# Altium PCB 400797.PcbDoc (part 1 of 8)
Units mm, origin at the board's own origin, x right, y up, seen from the top; angles counter-clockwise.
Board outline 155 x 63.5 mm, 4 copper layers (Top Layer, Mid-Layer 1, Mid-Layer 2, Bottom Layer), stack 1.514 mm thick; 333 components, 292 nets, 1555 pads, 2205 vias.
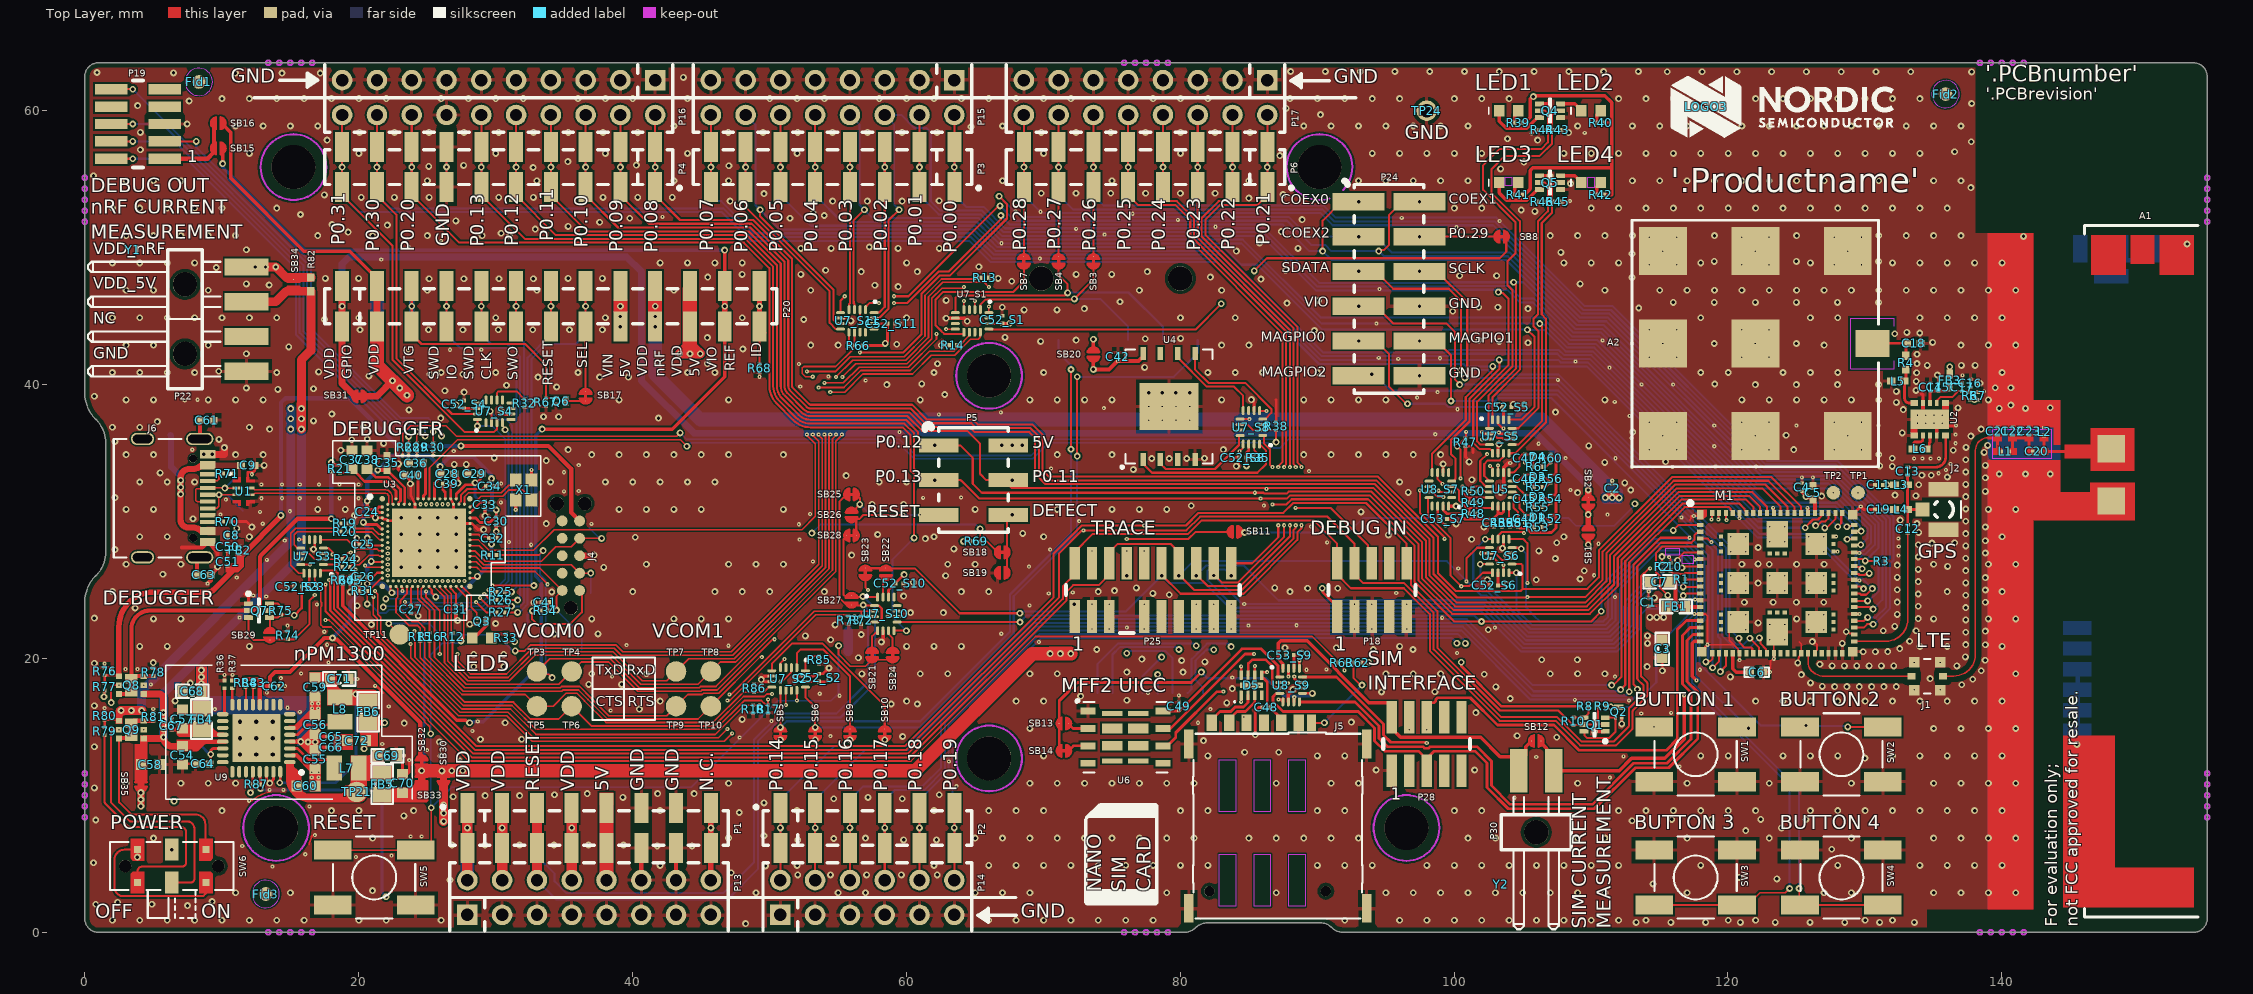
[diagram p0: Top Layer view]
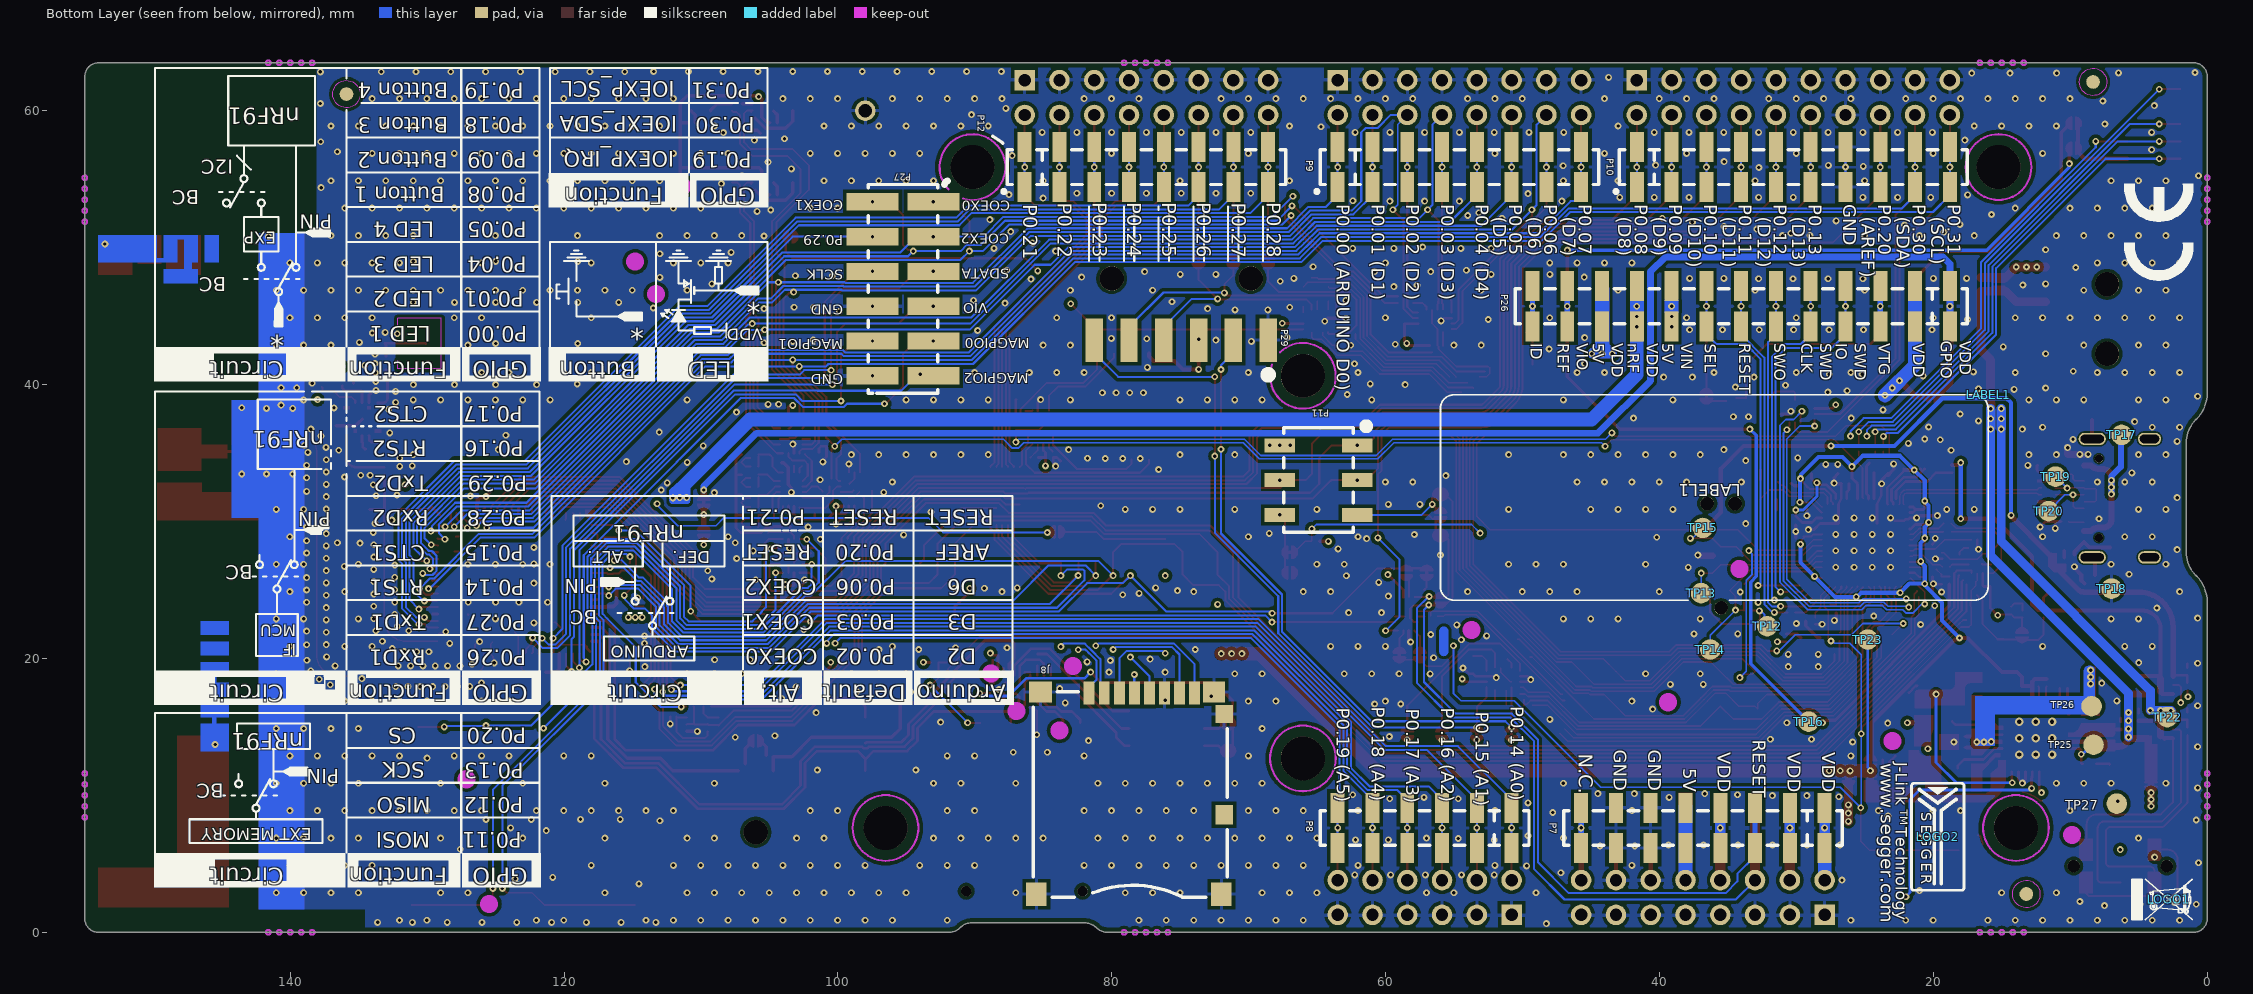
[diagram p1: Bottom Layer view, seen from below]
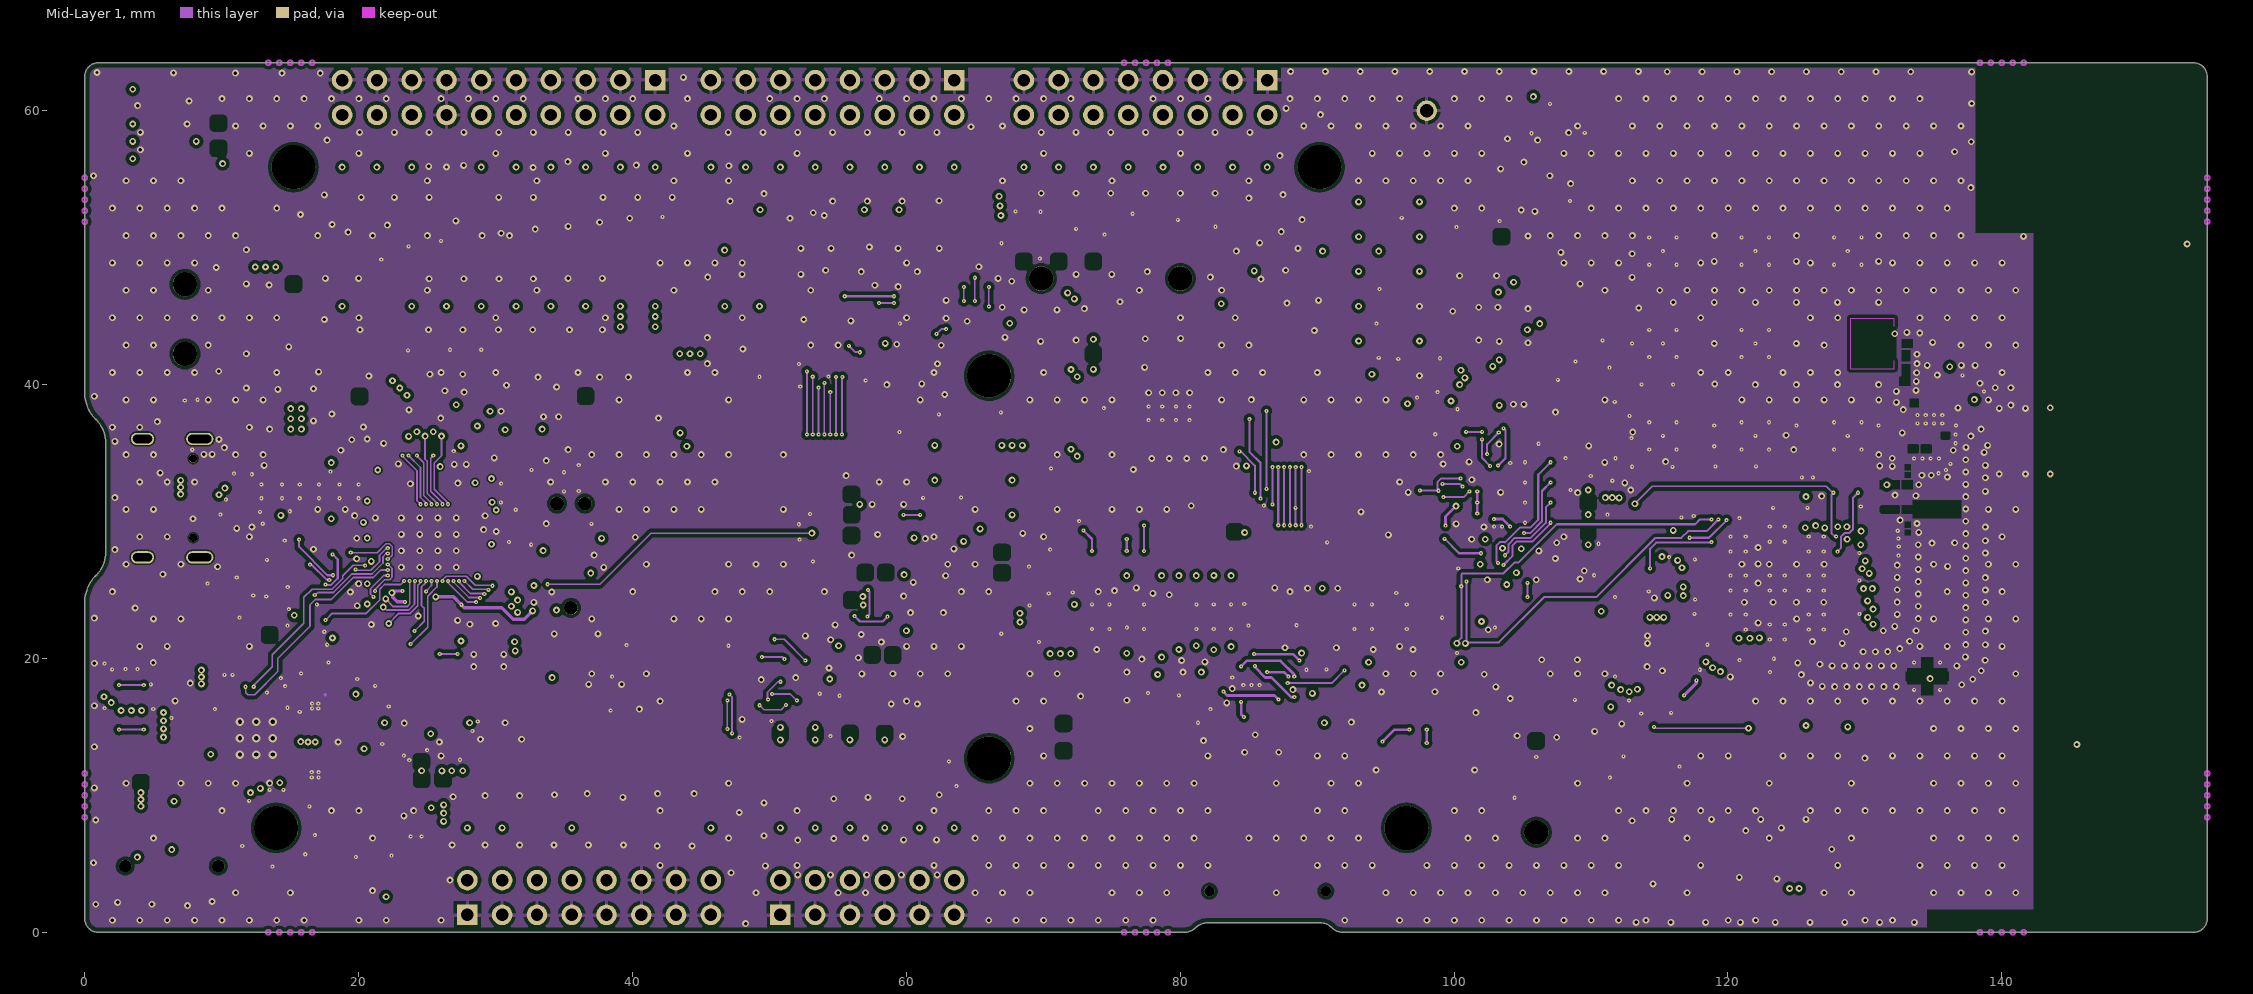
[diagram p2: Mid-Layer 1]
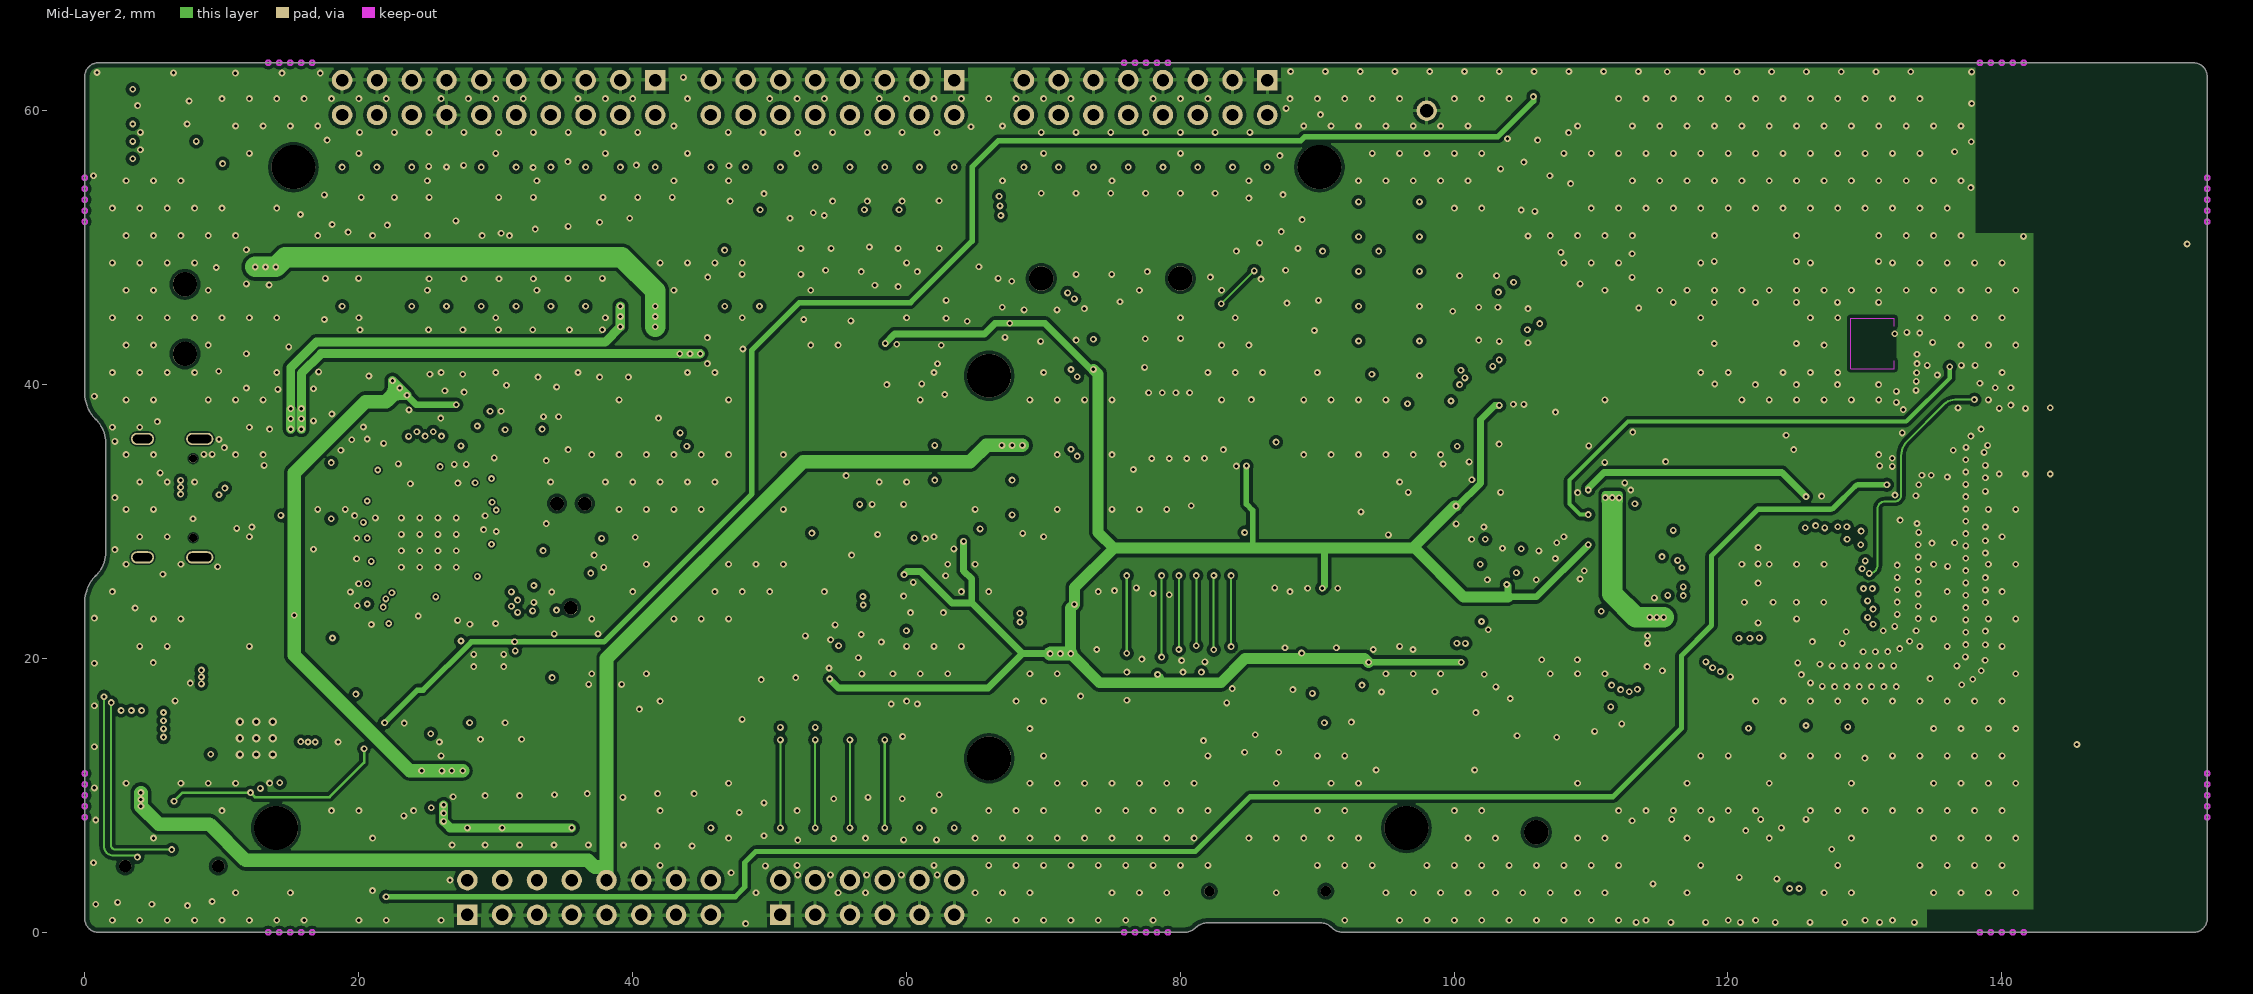
[diagram p3: Mid-Layer 2]
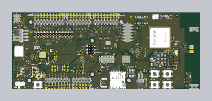
[diagram p9: 3D render of the assembled board from above, using the file's embedded part models]

## Layer stack, top to bottom
Top Solder: solder mask 0.05, Solder Resist Halogen-Free, Dk 3.5
Top Layer: signal copper 0.035
Dielectric1: prepreg 0.072, FR-4 Halogen-Free, Dk 4.18
Mid-Layer 1: signal copper 0.035
Dielectric2: core 1.23, FR-4 Halogen-Free, Dk 4.74
Mid-Layer 2: signal copper 0.035
Dielectric3: prepreg 0.072, FR-4 Halogen-Free, Dk 4.18
Bottom Layer: signal copper 0.035
Bottom Solder: solder mask 0.05, Solder Resist Halogen-Free, Dk 3.5

## Board outline
0,1 0,24.121 cw(c2.717,24.121) 0.796,26.042 0.962,26.208 ccw(c-0.876,27.751) 1.524,27.751 1.524,35.751 ccw(c-0.876,35.751) 0.962,37.294 0.796,37.46 cw(c2.717,39.381) 0,39.381 0,62.5 cw(c1,62.5) 1,63.5 154,63.5 cw(c154,62.5) 155,62.5 155,1 cw(c154,1) 154,0 91.9,0 cw(c91.9,1.18) 91.066,0.346 ccw(c90.231,-0.489) 90.231,0.691 81.969,0.691 ccw(c81.969,-0.489) 81.134,0.346 cw(c80.3,1.18) 80.3,0 1,0 cw(c1,1)

## Design rules (kind name [scope] priority, off if disabled: settings)
BoardOutlineClearance [OnLayer('Top Layer') or OnLayer('Bottom Layer') or OnLayer('Mid-Layer 1') or OnLayer('Mid-Layer 2')] p1: gap=0.35 ignorepadtopadclearanceinfootprint=FALSE
Clearance USB_C [InComponent('J6')] p1: gap=0.1 ignorepadtopadclearanceinfootprint=FALSE
Clearance IMCU_room [WithinRoom('IMCU')] p2: gap=0.1 ignorepadtopadclearanceinfootprint=FALSE
Clearance USB_Poly_Clearance [(InNamedPolygon('Top_Layer-GND')) vs (IsTrack or IsArc) and (InDifferentialPair('D') or InDifferentialPair('USB0'))] p3 off: gap=1 ignorepadtopadclearanceinfootprint=FALSE
Clearance "NPTH clearance" [Not PadIsPlated And HoleSize > 0] p4: gap=0.23 ignorepadtopadclearanceinfootprint=FALSE
Clearance SB_Clearance [HasFootprint('Solderbridge') or HasFootprint('QFN40P180X140X55-10N')] p5: gap=0.127 ignorepadtopadclearanceinfootprint=FALSE except(0: Arc-Hole Track-Hole SMDPad-Hole THPad-Hole Via-Hole Fill-Hole Poly-Hole Region-Hole Text-Hole)
Clearance CSP_Clearance [HasFootprint('BGA4C40P2X2_76X76X62')] p6: gap=0.127 ignorepadtopadclearanceinfootprint=FALSE except(0: Arc-Hole Track-Hole SMDPad-Hole THPad-Hole Via-Hole Fill-Hole Poly-Hole Region-Hole Text-Hole)
Clearance P23_Clearance [HasFootprint('FPC_05P-0.5mm-RA-SMD')] p7: gap=0.127 ignorepadtopadclearanceinfootprint=FALSE except(0: Arc-Hole Track-Hole SMDPad-Hole THPad-Hole Via-Hole Fill-Hole Poly-Hole Region-Hole Text-Hole)
Clearance PSON35P100X50-8N_Clearance [HasFootprint('PSON35P100X50-8N')] p8: gap=0.15 ignorepadtopadclearanceinfootprint=FALSE except(0: Arc-Hole Track-Hole SMDPad-Hole THPad-Hole Via-Hole Fill-Hole Poly-Hole Region-Hole Text-Hole)
Clearance "Net tie_clearance" [InComponent('NT*') vs IsPad] p9: gap=0.001 ignorepadtopadclearanceinfootprint=TRUE
Clearance Top_layer_Clearance [All vs OnLayer('Top Layer')] p10: gap=0.125 ignorepadtopadclearanceinfootprint=FALSE
Clearance Polygon_Clearance [InNamedPolygon('Top_Layer-GND') or InNamedPolygon('Bottom_Layer-GND') or InNamedPolygon('Mid_Layer_1-GND') or InNamedPolygon('Mid_Layer_2-GND')] p11: gap=0.25 ignorepadtopadclearanceinfootprint=FALSE except(0: Arc-Hole Track-Hole SMDPad-Hole THPad-Hole Via-Hole Fill-Hole Poly-Hole Region-Hole Text-Hole)
Clearance USB_Clearance [InDifferentialPairClass('All Differential Pairs')] p12: gap=0.15 ignorepadtopadclearanceinfootprint=FALSE
Clearance RF_Clerance [InNet('RF') or InNet('ANT')] p13: gap=0.203 ignorepadtopadclearanceinfootprint=FALSE except(0: Arc-Hole Track-Hole SMDPad-Hole THPad-Hole Via-Hole Fill-Hole Poly-Hole Region-Hole Text-Hole)
Clearance [All] p14: gap=0.125 ignorepadtopadclearanceinfootprint=FALSE except(0: Poly-Region Region-Region)
ComponentClearance [All] p1 off: gap=0.254 collisioncheckmode=3 verticalgap=0.254 showdistances=FALSE
DiffPairsRouting [InDifferentialPairClass('All Differential Pairs')] p1: maxlimit=0.15 minlimit=0.127 mostfreqgap=0.15 toplayer_mingap=0.15 toplayer_minwidth=0.1 toplayer_maxwidth=0.1 toplayer_prefwidth=0.1 midlayer1_maxgap=0.127 midlayer1_prefgap=0.127 midlayer1_minwidth=0.054 midlayer1_maxwidth=0.054 midlayer1_prefwidth=0.054 midlayer2_maxgap=0.127 midlayer2_prefgap=0.127 midlayer2_minwidth=0.054 midlayer2_maxwidth=0.054 midlayer2_prefwidth=0.054 bottomlayer_mingap=0.15 bottomlayer_minwidth=0.1 bottomlayer_maxwidth=0.1 bottomlayer_prefwidth=0.1 impedanceprofiledriven=TRUE impedanceprofileid={5F1D737F-A6A0-4321-8E3C-81C77A155CAF} impedanceprofilevalue=90.000000 maxuncoupledlength=12.7
FabricationTestPointUsage TestPointUsage [All] p1: valid=0 allowmultiple=FALSE
FabricationTestpoint Testpoint [All] p1: side=3 testpointundercomponent=TRUE minsize=1.016 maxsize=2.54 preferedsize=1.524 minholesize=0 maxholesize=1.016 preferedholesize=0.813 testpointgrid=0.025 allowsidetop=TRUE allowsidebottom=TRUE usegrid=TRUE gridtolerance=0
Height [All] p1 off: minheight=0 maxheight=25.4 prefheight=12.7
HoleSize [All] p1: absolutevalues=TRUE maxlimit=5 minlimit=0.1 maxpercent=80.000 minpercent=20.000
HoleToHoleClearance [All] p1: gap=0.25 allowstackedmicrovias=FALSE
MaxMinImpedance [InNetClass('USB')] p1: minimum=81.00 maximum=99.00
MinimumAnnularRing [All] p1 off: minimumring=0.152
MinimumSolderMaskSliver USB-C [HasFootprint('SD-80259-001')] p1: minsoldermaskwidth=0
MinimumSolderMaskSliver PMIC [WithinRoom('nPM1300')] p2: minsoldermaskwidth=0
MinimumSolderMaskSliver [All] p3: minsoldermaskwidth=0.05
NetAntennae NetAntennae_ANT [InNet('ANT')] p1: netantennaetolerance=40
NetAntennae [All] p2: netantennaetolerance=0
PlaneClearance [All] p1: clearance=0.25
PlaneConnect [All] p1: planeconnectstyle=Direct reliefexpansion=0.508 reliefentries=4 reliefconductorwidth=0.254 reliefairgap=0.254
PolygonConnect VDD_nRF [InNet('VDD_nRF')] p1: connectstyle=Direct reliefconductorwidth=0.254 reliefentries=4 polygonreliefangle="90 Angle" airgapwidth=0.254
PolygonConnect VCC_and_VDD [InNet('NetC50_2') or InNet('NetC8_2') or InNet('NetC70_2') or InNet('VDD')] p2: connectstyle=Direct reliefconductorwidth=0.254 reliefentries=4 polygonreliefangle="90 Angle" airgapwidth=0.254
PolygonConnect GND_Poly [isVia and innet(gnd) or isVia and innet('VDD') or HasFootprint('COAXIAL-SWF') or isVia and innet('VDD_SAM') or InComponent('R80') or HasFootprint('COAXIAL RF U.FL-R-SMT-1') or HasFootprint('DSGP.1575.18') or HasFootprint('DX07S016JA1R1500') or InComponent('C65')or InComponent('C66')or InComponent('C72')] p3: connectstyle=Direct reliefconductorwidth=0.254 reliefentries=4 polygonreliefangle="90 Angle" airgapwidth=0.254
PolygonConnect General [All] p4: connectstyle=Relief reliefconductorwidth=0.254 reliefentries=4 polygonreliefangle="90 Angle" airgapwidth=0.254
RoomDefinition IMCU [InComponentClass('IMCU') vs False] p1: confinementstyle=ConfineIn formatcopy=TRUE lockcomponents=FALSE outline 18.089,33.044 18.089,34.657 18.67,34.657 18.67,36.019 21.455,36.019 21.455,35.514 22.755,35.514 22.755,34.944 25.405,34.944 25.405,34.164 27.705,34.164 29.68,34.164 29.68,33.844 33.38,33.844 33.38,30.783 30.586,30.783 30.586,29.228 30.582,29.228 30.582,28.248 28.954,28.248 28.954,24.43 27.636,24.43 27.636,22.778 24.279,22.778 24.279,20.471 21.721,20.471 21.721,24.43 20.321,24.43 20.321,25.423 19.543,25.423 19.543,27.798 19.543,33.009 18.67,33.009 18.67,33.044
RoomDefinition nPM1300 [InComponentClass('nPM1300') vs False] p2: confinementstyle=ConfineIn formatcopy=TRUE lockcomponents=FALSE outline 5.35,8.145 5.35,10.653 5.818,10.653 5.818,15.861 6.348,15.861 6.348,17.026 6.398,17.026 6.398,18.376 9.691,18.376 9.691,18.879 10.26,18.879 10.26,18.886 16.048,18.886 16.048,19.363 17.248,19.363 17.248,19.376 19.114,19.376 19.114,39.997 21.021,39.997 21.021,22.634 26.049,22.634 26.049,12.152 27.049,12.152 27.049,10.245 23.973,10.245 23.973,9.42 22.781,9.42 22.781,9.118 20.381,9.118 20.381,8.543 7.858,8.543 7.858,8.145
RoutingLayers RoutingLayers_1 [IsMicroVia] p1: top layer_v5=TRUE mid layer 1_v5=TRUE mid layer 2_v5=FALSE bottom layer_v5=FALSE
RoutingLayers [All] p2: top layer_v5=TRUE mid layer 1_v5=TRUE mid layer 2_v5=TRUE bottom layer_v5=TRUE
RoutingVias [All] p1: holewidth=0.25 width=0.5 viastyle="Through Hole" minholewidth=0.1 minwidth=0.3 maxholewidth=0.305 maxwidth=0.61
ShortCircuit "PVSS and GND" [InNet('PVSS1') or InNet('PVSS2') vs InNet('GND')] p1: allowed=TRUE
ShortCircuit ShortCircuit_1 [HasFootprint('P822601')] p2: allowed=TRUE
ShortCircuit [All] p3: allowed=FALSE
SilkToSilkClearance [All] p1: silktosilkclearance=0.15
SilkToSolderMaskClearance SilkscreenOverComponentPads [IsPad] p1: minsilkscreentomaskgap=0.254 clearancetoexposedcopper=TRUE
SolderMaskExpansion SolderMaskExpansion_Via [IsVia] p1: expansion=0.102 istentingtop=TRUE
SolderMaskExpansion SolderMaskExpansion_USB [HasFootprint('L-KLS1-5473')] p2: expansion=0.06 istentingtop=FALSE
SolderMaskExpansion [All] p3: expansion=0.076 istentingtop=FALSE
UnpouredPolygon [All] p1 off:
Width Width_RF [InNet('ANT') or InNet('LTE_RF1') or InNet('GPS_RF1')] p1: maxlimit=0.254 minlimit=0.1 preferedwidth=0.254 toplayer_maxwidth=0.1 toplayer_prefwidth=0.1 bottomlayer_maxwidth=0.1 bottomlayer_prefwidth=0.1 impedanceprofiledriven=TRUE impedanceprofileid={28F3A609-7DB3-45B1-BB45-39A827C1017D} impedanceprofilevalue=50.000000 minimp=50.000000 maximp=50.000000 favimp=50.000000
Width Width_Diff [(InDifferentialPairClass('All Differential Pairs'))] p2: maxlimit=0.165 minlimit=0.1 preferedwidth=0.165 toplayer_maxwidth=0.1 toplayer_prefwidth=0.1 bottomlayer_maxwidth=0.1 bottomlayer_prefwidth=0.1 minimp=50.000000 maximp=50.000000 favimp=50.000000
Width Width_GPIO [InNetClass('GPIO')] p3: maxlimit=0.152 minlimit=0.125 preferedwidth=0.15 minimp=50.000000 maximp=50.000000 favimp=50.000000
Width Width_GPIO_1 [InNetClass('COEX')] p4: maxlimit=0.152 minlimit=0.125 preferedwidth=0.15 minimp=50.000000 maximp=50.000000 favimp=50.000000
Width Width_GPIO_2 [InNetClass('SWD')] p5: maxlimit=0.152 minlimit=0.125 preferedwidth=0.15 minimp=50.000000 maximp=50.000000 favimp=50.000000
Width Width_GPIO_3 [InNetClass('UART')] p6: maxlimit=0.152 minlimit=0.125 preferedwidth=0.15 minimp=50.000000 maximp=50.000000 favimp=50.000000
Width [All] p7: maxlimit=2.54 minlimit=0.125 preferedwidth=0.15
14 further rules are at their usual default settings.

## Classes and differential pairs
differential pair class IMCU: D
differential pair class D:J6: D:J6
net class USB: D:J6_N D:J6_P D_N D_P
net class VCOM: VCOM0_CTRL VCOM0_CTS VCOM0_HWFC VCOM0_RTS VCOM0_RXD VCOM0_TXD VCOM1_CTRL VCOM1_CTS VCOM1_HWFC VCOM1_RTS VCOM1_RXD VCOM1_TXD
net class nRF9151_UART: P0.14/AIN1 P0.15/AIN2 P0.16/AIN3 P0.17/AIN4 P0.26 P0.27 P0.28 P0.29
net class EXT_MEM: P0.11 P0.12 P0.13/AIN0 P0.20/AIN7
component class IMCU: C24 C25 C26 C27 C28 C29 C30 C31 C32 C33 C34 C35 C36 C37 C38 C39 C40 R21 TP11 U3 X1
component class nPM1300: C54 C55 C56 C57 C59 C60 C62 C64 C65 C66 C67 C68 C69 C70 C71 C72 FB4 FB5 FB6 L7 L8 R36 R37 R87 SB30 SB31 SB32 SB33 TP21 TP23 TP25 TP26 TP27 U9
net class RF: ANT GPS_RF1 GPS_RF2 GPS_RF3 GPS_RF4 GPS_RF5 LTE_RF1 NetA1_1 NetC20_1
channel class pca10171_switch_nx: S7 S9
channel class pca10171_switch_fsa: S1 S2 S3 S4 S5 S6 S8 S10 S11
net class SWD: P0.22 RESET SWD0_CLK SWD0_IO SWD0_RESET SWD0_SEL SWD0_SWO SWD1_CLK SWD1_IO SWD1_RESET SWD1_SEL SWD1_SWO SWD3_CLK SWD3_IO SWD3_RESET SWD3_SWO SWD_CTRL SWDCLK SWDIO
net class COEX: COEX0 COEX1 COEX2 MAGPIO0 MAGPIO1 MAGPIO2 MIPI_SCLK MIPI_SDATA MIPI_VIO
net class GPIO: AREF BTN1_EXT BTN2_EXT BTN3_EXT BTN4_EXT BUTTON1 BUTTON2 BUTTON3 BUTTON4 COEX0 COEX1 COEX2 COEX_SELECT COM.CH1_S1 COM.CH2_S2 COM.CH3_S1 COM.CH4_S2 EXT_MEM_C\S\ EXT_MEM_CTRL EXT_MEM_MISO EXT_MEM_MOSI EXT_MEM_SCK IMCU_LED IMCU_SCL IMCU_SDA INT_EXT IOEXP_CTRL LED1 LED1_EXT LED2 LED2_EXT LED3 LED3_EXT LED4 LED4_EXT MAGPIO0 MAGPIO1 MAGPIO2 MIPI_SCLK MIPI_SDATA MIPI_VIO NC.CH1_S3 NC.CH3_S3 NC.CH4_S3 NetC44_1 NetC45_2 NetC46_2 NetC47_2 NetR51_1 NetR58_1 NO.CH1_S8 P0.00 P0.01 P0.02 P0.03 P0.04 P0.05 P0.06 P0.07 P0.08 P0.09 P0.10 P0.11 P0.12 P0.13/AIN0 P0.14/AIN1 P0.15/AIN2 P0.16/AIN3 P0.17/AIN4 P0.18/AIN5 P0.19/AIN6 P0.20/AIN7 P0.21 P0.22 P0.23 P0.24 P0.25 P0.26 P0.27 P0.28 P0.29 P0.30 P0.31 RESET RESET_BUTTON RESET_IN_CTRL RESET_OUT_CTRL SCL_EXT SDA_EXT SHIELD_DETECT SIM_SELECT SWD0_CLK SWD0_IO SWD0_RESET SWD0_SEL SWD0_SWO SWD1_CLK SWD1_IO SWD1_RESET SWD1_SEL SWD1_SWO SWD3_CLK SWD3_IO SWD3_RESET SWD3_SWO SWD_CTRL SWDCLK SWDIO TGT_SCL TGT_SDA TGT_TWI_CTRL UART1.CTS UART1.RTS UART1.RXD UART1.TXD UART2.CTS UART2.RTS UART2.RXD UART2.TXD USB_DETECT VCOM0_CTRL VCOM0_CTS VCOM0_HWFC VCOM0_RTS VCOM0_RXD VCOM0_TXD VCOM1_CTRL VCOM1_CTS VCOM1_HWFC VCOM1_RTS VCOM1_RXD VCOM1_TXD VIO_REF_SENSE
differential pair D: +D_P -D_N
differential pair D:J6: +D:J6_P -D:J6_N

## Components (designator, comment, footprint, x,y, rotation, side; value= is the part's Value field where it differs from the comment)
A1 "P822601" P822601 150.28,26.417 r270 top
A2 "DSGP.1575.18" DSGP.1575.18.4.C.02 122,43 r90 top
C1 "1.0µF" CAPC0603X03L_C 114.19,24.1 r90 top
C2 "1.0µF" CAPC0603X03L_C 111.55,32.425 r90 top
C3 "10µF" CAPC1608X06L 115.2,20.7 r270 top
C4 "100nF" CAPC0603X03L_C 125.4,32.5 r90 top
C5 "4.7µF" CAPC1005X04L 126.2,32.1 r90 top
C6 "4.7µF" CAPC1005X04L 122.1,19 r0 top
C7 "10µF" CAPC1608X06L 115,25.6 r180 top
C8 "100nF" CAPC0603X03L_C 10.7,29 r180 top
C9 "1.0µF" CAPC1005X04L 11.9,34.1 r180 top
C10 "100nF" CAPC0603X03L_C 115.8,26.7 r90 top
C11 "39pF" CAPC0603X03L_C 131.03,32.68 r0 top
C12 "39pF" CAPC0603X03L_C 133.13,29.48 r270 top
C13 "39pF" CAPC0603X03L_C 133.13,33.682 r270 top
C14 "100pF" CAPC0603X03L_C 134.8,39.822 r270 top
C15 "100nF" CAPC0603X03L_C 135.375,39.822 r270 top
C16 "100nF" CAPC0603X03L_C 137.7,40.1 r270 top
C17 "100pF" CAPC0603X03L_C 137.1,39.8 r270 top
C18 "N.C." CAPC1005X04L_NC 133.575,43 r0 top
C19 "N.C." CAPC0603X03L_C_NC 131.03,30.88 r0 top
C20 "3.5pF" CAPC0603X03L_C 142.545,35.117 r0 top
C21 "N.C." CAPC0603X03L_C_NC 139.7,36.577 r270 top
C22 "N.C." CAPC0603X03L_C_NC 140.784,36.577 r270 top
C23 "N.C." CAPC0603X03L_C_NC 141.986,36.577 r270 top
C24 "100nF" CAPC0603X03L_C 20.625,30.709 r90 top
C25 "100nF" CAPC0603X03L_C 20.35,28.334 r0 top
C26 "100nF" CAPC0603X03L_C 20.35,25.959 r180 top
C27 "100nF" CAPC0603X03L_C 23.827,23.584 r90 top
C28 "1.0µF" CAPC1005X04L 26.475,33.484 r0 top
C29 "1.0µF" CAPC1005X04L 28.45,33.484 r0 top
C30 "2.2nF" CAPC0603X03L_C 30.05,30.034 r270 top
C31 "100nF" CAPC0603X03L_C 27.1,23.584 r90 top
C32 "100nF" CAPC0603X03L_C 29.775,28.784 r180 top
C33 "100nF" CAPC0603X03L_C 29.225,31.234 r90 top
C34 "100nF" CAPC0603X03L_C 29.575,32.575 r0 top
C35 "1.0µF" CAPC1005X04L 22.075,34.284 r270 top
C36 "1.0µF" CAPC1005X04L 24.175,34.264 r0 top
C37 "4.7µF" CAPC1608X06L 19.5,34.514 r90 top
C38 "4.7µF" CAPC1608X06L 20.625,34.514 r90 top
C39 "100nF" CAPC0603X03L_C 26.444,32.759 r0 top
C40 "1.0µF" CAPC1005X04L 23.825,33.389 r0 top
C41 "10nF" CAPC0603X03L_C 33.625,24.1 r0 top
C42 "100nF" CAPC0603X03L_C 75.45,42.05 r270 top
C43 "100nF" CAPC0603X03L_C 102.927,29.912 r90 top
C44 "1.0µF" CAPC0603X03L_C 105.174,30.191 r270 top
C45 "1.0µF" CAPC0603X03L_C 105.174,31.664 r90 top
C46 "1.0µF" CAPC0603X03L_C 105.174,33.137 r90 top
C47 "1.0µF" CAPC0603X03L_C 105.174,34.611 r90 top
C48 "10nF" CAPC0603X03L_C 86.275,16.425 r180 top
C49 "N.C." CAPC0603X03L_C_NC 79.9,16.5 r270 top
C50 "10nF" CAPC0603X03L_C 10.425,28.15 r90 top
C51 "100nF" CAPC0603X03L_C 10.425,27.05 r270 top
C52_S1 "100nF" CAPC0603X03L_C 67,44.75 r90 top (schematic designator C52)
C52_S2 "100nF" CAPC0603X03L_C 53.625,18.6 r90 top (schematic designator C52)
C52_S3 "100nF" CAPC0603X03L_C 15.55,25.25 r180 top (schematic designator C52)
C52_S4 "100nF" CAPC0603X03L_C 27.7,38.55 r90 top (schematic designator C52)
C52_S5 "100nF" CAPC0603X03L_C 103.898,38.359 r0 top (schematic designator C52)
C52_S6 "100nF" CAPC0603X03L_C 102.923,25.334 r180 top (schematic designator C52)
C52_S8 "100nF" CAPC0603X03L_C 84.553,34.671 r180 top (schematic designator C52)
C52_S10 "100nF" CAPC0603X03L_C 59.5,25.475 r0 top (schematic designator C52)
C52_S11 "100nF" CAPC0603X03L_C 58.9,44.45 r0 top (schematic designator C52)
C53_S7 "100nF" CAPC0603X03L_C 99.197,30.192 r0 top (schematic designator C53)
C53_S9 "100nF" CAPC0603X03L_C 88,20.25 r180 top (schematic designator C53)
C54 "1.0µF" CAPC1608X06L 7.127,12.922 r90 top
C55 "10µF" CAPC1608X06L 16.827,12.622 r90 top
C56 "10µF" CAPC1608X06L 16.827,15.172 r270 top
C57 "10µF" CAPC1608X06L 7.127,15.572 r270 top
C58 "4.7µF" CAPC1608X06L 4.795,12.243 r180 top
C59 "10µF" CAPC1608X06L 16.827,17.909 r90 top
C60 "10µF" CAPC1608X06L 16.15,10.7 r180 top
C61 "10nF" CAPC1005X04L 8.9,37.4 r0 top
C62 "100nF" CAPC0603X03L_C 13.825,17.975 r0 top
C63 "10nF" CAPC1005X04L 8.7,26.1 r0 top
C64 "1.0µF" CAPC1005X04L 8.6,12.3 r0 top
C65 "1.0nF" CAPC0603X03L_C 18.012,14.297 r180 top
C66 "1.0nF" CAPC0603X03L_C 18.012,13.497 r180 top
C67 "1.0nF" CAPC0603X03L_C 6.327,15.082 r270 top
C68 "N.C." CAPC1608X06L_NC 7.852,17.597 r0 top
C69 "N.C." CAPC1608X06L_NC 22.102,12.897 r180 top
C70 "100nF" CAPC1608X06L 23.194,10.874 r270 top
C71 "N.C." CAPC1608X06L_NC 18.581,18.505 r180 top
C72 "100nF" CAPC1608X06L 19.852,13.997 r0 top
D1 "CFSH05-20L" SODFL35X40-2N 106.114,30.318 r180 top
D2 "CFSH05-20L" SODFL35X40-2N 106.114,31.791 r180 top
D3 "CFSH05-20L" SODFL35X40-2N 106.114,33.264 r180 top
D4 "CFSH05-20L" SODFL35X40-2N 106.114,34.738 r180 top
D5 "TPD3F303DPVR" SON50P210X160X65_HS-9N 85.2,18.05 r90 top
FB1 "22R@100M/6A" INDC1608X06L 116.2,23.8 r0 top
FB2 "120R/0.9A" INDC0603X03L_C 11.3,27.9 r270 top
FB3 "120R/1.2A" INDC1005X04L 136.2,40.3 r90 top
FB4 "0R" RESC2012X11L 8.527,15.572 r90 top
FB5 "0R" RESC2012X11L 21.727,10.822 r270 top
FB6 "0R" RESC2012X11L 20.7,16.1 r270 top
Fid1 "Fiducial mark" Fiducial 8.335,62.104 r0 top value=N.A.
Fid2 "Fiducial mark" Fiducial 135.89,61.214 r0 top value=N.A.
Fid3 "Fiducial mark" Fiducial 13.208,2.795 r0 top value=N.A.
J1 "MM8130-2600" COAXIAL-SWF 134.554,18.7 r90 top
J2 "MHF I Receptacle" "COAXIAL RF U.FL-R-SMT-1" 135.73,30.88 r270 top
J4 "TC2050-IDC" TC2050-IDC-NLFP 35.5,27.5 r90 top
J5 "KLS1-SIM-066" KLS1-SIM-066 82.3,15.3 r0 top
J6 "USB-C 2.0" SD-80259-001 6.6,31.705 r270 top
J8 "microSD Card Connector" Molex_502774-0891 72.75,17.55 r0 bottom
L1 "1.5nH" INDC0603X03L_C 140.233,35.117 r0 top
L2 "22nH" INDC0603X03L_C 143.084,36.573 r270 top
L3 "68nH" INDC1005X04L_WW 132.63,32.68 r0 top
L4 "N.C." INDC1005X04L_NC 132.63,30.88 r180 top
L5 "N.C." INDC1005X04L_NC 132.4,40.25 r180 top
L6 "9.1nH" INDC1005X04L_WW 134,35.3 r180 top
L7 "2.2µH" INDC2016X10N 19.112,11.997 r180 top
L8 "2.2µH" INDC2016X10N 18.625,16.275 r270 top
LABEL1 "15x40mm" LabelSilk_15x40 16,39.251 r0 bottom
LED1 "L0603G" LED_0603_G 104,60 r0 top
LED2 "L0603G" LED_0603_G 110,60 r0 top
LED3 "L0603G" LED_0603_G 104,54.75 r0 top
LED4 "L0603G" LED_0603_G 110,54.75 r0 top
LED5 "L0603G" LED_0603_G 29,21.5 r0 top
LOGO1 "WEE Symbol" WEE_3x4.5mm 2.8,2.4 r270 bottom
LOGO2 "Segger Logo S" SEGGER_LOGO_S 19.675,6.975 r270 bottom
LOGO3 "Nordic Logo" NORDIC_LOGO_LYING 118.4,60.275 r0 top
M1 "nRF9151-LACAA0A" LGA50P1210X1110X130-113N 123.6,25.5 r270 top
P1 "Socket 1x8" SOCKET_1x8_SMD 27.94,7.621 r0 top
P2 "Socket 1x6" SOCKET_1x6_SMD 50.8,7.621 r0 top
P3 "Socket 1x8" SOCKET_1x8_SMD 63.5,55.881 r180 top
P4 "Socket 1x10" SOCKET_1x10_SMD 41.656,55.881 r180 top
P5 "Pin Hdr 2x3" HDR_2x3-SMD 64.897,33.021 r270 top
P6 "Socket 1x8" SOCKET_1x8_SMD 86.36,55.881 r180 top
P7 "Pin List 1x8" LIST_1x8_SMD-NC 27.94,7.621 r0 bottom
P8 "Pin List 1x6" LIST_1x6_SMD-NC 50.8,7.621 r0 bottom
P9 "Pin List 1x8" LIST_1x8_SMD-NC 63.5,55.881 r180 bottom
P10 "Pin List 1x10" LIST_1x10_SMD-NC 41.656,55.881 r180 bottom
P11 "Socket 2x3" SOCKET_2x3_SMD-2.54mm-bottom-NC 64.897,33.021 r270 top
P12 "Pin List 1x8" LIST_1x8_SMD-NC 86.36,55.881 r180 bottom
P13 "Pin Header 2x8" HDR_2x8-NC 36.83,2.541 r0 top
P14 "Pin Header 2x6" HDR_2x6-NC 57.15,2.541 r0 top
P15 "Pin Header 2x8" HDR_2x8-NC 54.61,60.961 r180 top
P16 "Pin Header 2x10" HDR_2x10-NC 30.226,60.961 r180 top
P17 "Pin Header 2x8" HDR_2x8-NC 77.47,60.961 r180 top
P18 "Pin Header 2x5, 1.27mm" HDR_2x5-SMD-1.27mm-K 94,25 r0 top
P19 "Pin Header 2x5, 1.27mm" HDR_2x5-SMD-1.27mm-K 3.886,59.031 r90 top
P20 "Pin List 1x13" LIST_1x13_SMD 18.796,45.721 r0 top
P22 "Pin List 1x4, Angled" LIST_ANG_1x4-SMD-2.54MM 11.811,44.779 r270 top
P24 "Socket 2x6" SOCKET_2x6_SMD-2.54mm#1 95.25,46.991 r270 top
P25 "Pin Header 2x10, 1.27mm, SWD" HDR_2x10-SMD-1.27mm-K-SWD 78,25 r0 top
P26 "Socket 1x13" LIST_1x13_SMD-NC 18.796,45.721 r0 bottom
P27 "Socket 2x6" SOCKET_2x6_SMD-2.54mm#2 95.25,46.991 r270 bottom
P28 "Pin Header 2x5, 1.27mm" HDR_2x5-SMD-1.27mm 98,13.75 r0 top
P29 "Pin List 1x6, Angled" LIST_ANG_1x6-SMD-2.54MM 74.93,43.25 r0 bottom
P30 "Pin List 1x2, Angled" LIST_ANG_1x2-SMD-2.54MM 106,11.8 r0 top
Q1 "DMC2400UV" SOTFL50P162X60-6N 110.265,15.175 r180 top
Q2 "RV2C010UNT2L" DFN65P100X40-3L 112.015,16.1 r90 top
Q3 "RV2C010UNT2L" DFN65P100X40-3L 28.975,22.725 r0 top
Q4 "UM6X1NA" SOTFL50P162X60-6N 107,60 r180 top
Q5 "UM6X1NA" SOTFL50P162X60-6N 107,54.75 r180 top
Q6 "RV2C010UNT2L" DFN65P100X40-3L 34.775,38.8 r0 top
Q7 "DMC2400UV" SOTFL50P162X60-6N 12.725,23.5 r0 top
Q8 "MCM2301" DFN65P200X200X80_HS-6N 3.4,18.05 r0 top
Q9 "MCM2301" DFN65P200X200X80_HS-6N 3.4,14.8 r0 top
R1 "10k" RESC0603X03L_C 116.6,25.8 r0 top
R2 "1k" RESC0603X03L_C 115.2,26.7 r270 top
R3 "1M0" RESC0603X03L_C 131.2,27.1 r180 top
R4 "0R" RESC1005X04L 133,41.6 r90 top
R6 "1k" RESC0603X03L_C 137.675,39.172 r90 top
R7 "1M0" RESC0603X03L_C 138.25,39.172 r270 top
R8 "10k" RESC0603X03L_C 109.54,16.5 r0 top
R9 "N.C." RESC0603X03L_C_NC 110.815,16.5 r0 top
R10 "100k" RESC0603X03L_C 108.715,15.4 r90 top
R11 "150R" RESC0603X03L_C 29.775,27.55 r0 top
R12 "150R" RESC0603X03L_C 26.85,21.584 r270 top
R13 "1M0" RESC0603X03L_C 65.725,47.8 r0 top
R14 "1M0" RESC0603X03L_C 63.4,42.875 r0 top
R15 "150R" RESC0603X03L_C 24.5,21.584 r270 top
R16 "150R" RESC0603X03L_C 25.175,21.584 r270 top
R17 "1M0" RESC0603X03L_C 49.9,16.3 r270 top
R18 "1M0" RESC0603X03L_C 48.8,16.3 r90 top
R19 "150R" RESC0603X03L_C 18.975,29.859 r180 top
R20 "150R" RESC0603X03L_C 18.975,29.259 r180 top
R21 "2R2" RESC0603X03L_C 18.625,33.85 r270 top
R22 "150R" RESC0603X03L_C 19.075,26.684 r180 top
R23 "N.C." RESC0603X03L_C_NC 16.675,25.25 r180 top
R24 "1M0" RESC0603X03L_C 19.075,27.275 r180 top
R25 "150R" RESC0603X03L_C 30.375,24.859 r0 top
R26 "150R" RESC0603X03L_C 30.375,24.259 r0 top
R27 "150R" RESC0603X03L_C 30.375,23.359 r0 top
R28 "150R" RESC0603X03L_C 23.65,35.409 r90 top
R29 "150R" RESC0603X03L_C 24.25,35.409 r90 top
R30 "150R" RESC0603X03L_C 25.45,35.409 r90 top
R31 "1M0" RESC0603X03L_C 20.35,24.925 r180 top
R32 "1M0" RESC0603X03L_C 32.1,38.65 r90 top
R33 "120R" RESC0603X03L_C 30.75,21.5 r270 top
R34 "100k" RESC0603X03L_C 33.625,23.5 r180 top
R35 "100k" RESC0603X03L_C 85.653,34.671 r180 top
R36 "47k" RESC0603X03L_C 10.2,18.1 r90 top
R37 "150k" RESC0603X03L_C 10.769,18.107 r90 top
R38 "1M0" RESC0603X03L_C 87.003,36.946 r270 top
R39 "120R" RESC0603X03L_C 104.699,59.118 r0 top
R40 "120R" RESC0603X03L_C 110.699,59.118 r0 top
R41 "120R" RESC0603X03L_C 104.699,53.868 r0 top
R42 "120R" RESC0603X03L_C 110.699,53.868 r0 top
R43 "1M0" RESC0603X03L_C 107.574,58.6 r180 top
R44 "1M0" RESC0603X03L_C 106.456,58.6 r0 top
R45 "1M0" RESC0603X03L_C 107.563,53.35 r180 top
R46 "1M0" RESC0603X03L_C 106.445,53.35 r0 top
R47 "1M0" RESC0603X03L_C 100.825,35.775 r90 top
R48 "4k7" RESC0603X03L_C 101.403,30.572 r0 top
R49 "4k7" RESC0603X03L_C 101.403,31.385 r0 top
R50 "12k" RESC0603X03L_C 101.403,32.198 r0 top
R51 "12k" RESC0603X03L_C 104.68,29.912 r270 top
R52 "100k" RESC0603X03L_C 107.048,30.191 r90 top
R53 "18k" RESC0603X03L_C 106.114,29.581 r0 top
R54 "100k" RESC0603X03L_C 107.048,31.664 r90 top
R55 "18k" RESC0603X03L_C 106.114,31.055 r0 top
R56 "100k" RESC0603X03L_C 107.048,33.137 r90 top
R57 "18k" RESC0603X03L_C 106.114,32.528 r0 top
R58 "0R" RESC0603X03L_C 104.095,29.912 r270 top
R59 "N.C." RESC0603X03L_C_NC 103.511,29.912 r90 top
R60 "100k" RESC0603X03L_C 107.048,34.611 r90 top
R61 "18k" RESC0603X03L_C 106.114,34.001 r0 top
R62 "1M0" RESC0603X03L_C 92.95,19.7 r180 top
R63 "100k" RESC0603X03L_C 91.8,19.7 r0 top
R64 "100k" RESC0603X03L_C 18.825,25.7 r90 top
R65 "100k" RESC0603X03L_C 19.4,25.7 r90 top
R66 "1M0" RESC0603X03L_C 56.5,42.85 r180 top
R67 "1M0" RESC0603X03L_C 33.675,38.7 r270 top
R68 "1k87" RESC0603X03L_C 49.276,41.175 r90 top
R69 "1M0" RESC0603X03L_C 65.1,28.55 r180 top
R70 "5k1" RESC0603X03L_C 10.4,30 r180 top
R71 "5k1" RESC0603X03L_C 10.4,33.5 r180 top
R72 "1M0" RESC0603X03L_C 56.7,22.8 r270 top
R73 "1M0" RESC0603X03L_C 55.775,22.8 r90 top
R74 "47k" RESC0603X03L_C 14.825,21.7 r270 top
R75 "1M0" RESC0603X03L_C 14.325,23.5 r90 top
R76 "100k" RESC0603X03L_C 1.45,19.05 r90 top
R77 "10k" RESC0603X03L_C 1.45,17.95 r270 top
R78 "150k" RESC0603X03L_C 5,19 r270 top
R79 "10k" RESC0603X03L_C 1.45,14.7 r90 top
R80 "1M0" RESC0603X03L_C 1.45,15.8 r90 top
R81 "100k" RESC0603X03L_C 5,15.735 r90 top
R82 "N.C." RESC1005X04L_NC 16.51,47.319 r270 top
R83 "4k7" RESC0603X03L_C 12.337,18.217 r90 top
R84 "4k7" RESC0603X03L_C 11.737,18.217 r90 top
R85 "100k" RESC0603X03L_C 53.625,19.9 r270 top
R86 "100k" RESC0603X03L_C 48.875,17.825 r90 top
R87 "0R" RESC0603X03L_C 12.537,10.8 r0 top
SB1 "Solderbridge" Solderbridge 109.8,29.2 r90 top
SB2 "Solderbridge" Solderbridge_Shorted 109.8,31.4 r270 top net-tie
SB3 "Solderbridge" Solderbridge_Shorted 73.66,49 r270 top net-tie
SB4 "Solderbridge" Solderbridge_Shorted 71.12,49 r270 top net-tie
SB5 "Solderbridge" Solderbridge_Shorted 50.8,14.5 r90 top net-tie
SB6 "Solderbridge" Solderbridge_Shorted 53.34,14.5 r90 top net-tie
SB7 "Solderbridge" Solderbridge_Shorted 68.58,49 r270 top net-tie
SB8 "Solderbridge" Solderbridge_Shorted 103.473,50.801 r0 top net-tie
SB9 "Solderbridge" Solderbridge_Shorted 55.88,14.5 r90 top net-tie
SB10 "Solderbridge" Solderbridge_Shorted 58.42,14.5 r90 top net-tie
SB11 "Solderbridge" Solderbridge 84,29.25 r0 top
SB12 "Solderbridge" Solderbridge 106,13.975 r180 top
SB13 "Solderbridge" Solderbridge 71.5,15.25 r180 top
SB14 "Solderbridge" Solderbridge_Shorted 71.5,13.25 r180 top net-tie
SB15 "Solderbridge" Solderbridge 9.75,57.25 r0 top
SB16 "Solderbridge" Solderbridge 9.75,59.095 r0 top
SB17 "Solderbridge" Solderbridge_Shorted 36.576,39.148 r90 top net-tie
SB18 "Solderbridge" Solderbridge_Shorted 67,27.75 r180 top net-tie
SB19 "Solderbridge" Solderbridge 67,26.25 r0 top
SB20 "Solderbridge" Solderbridge 73.66,42.205 r90 top
SB21 "Solderbridge" Solderbridge_Shorted 57.5,20.25 r270 top net-tie
SB22 "Solderbridge" Solderbridge 58.5,26.25 r270 top
SB23 "Solderbridge" Solderbridge_Shorted 57,26.25 r270 top net-tie
SB24 "Solderbridge" Solderbridge_Shorted 59,20.25 r270 top net-tie
SB25 "Solderbridge" Solderbridge_Shorted 56,31.981 r0 top net-tie
SB26 "Solderbridge" Solderbridge 56,30.481 r90 top
SB27 "Solderbridge" Solderbridge 56,24.25 r90 top
SB28 "Solderbridge" Solderbridge_Shorted 56,28.981 r0 top net-tie
SB29 "Solderbridge" Solderbridge 13.525,21.7 r270 top
SB30 "Solderbridge" Solderbridge_Shorted_Power 26.2,11.2 r90 top net-tie
SB31 "Solderbridge" Solderbridge_Shorted_Power 20.066,39.148 r180 top net-tie
SB32 "Solderbridge" Solderbridge_Shorted 24.6,12.4 r90 top net-tie
SB33 "Solderbridge" Solderbridge_Shorted_Power 24.6,11.2 r90 top net-tie
SB34 "Solderbridge" Solderbridge 15.24,47.319 r270 top
SB35 "Solderbridge" Solderbridge_Shorted_Power 4.1,10.8 r270 top net-tie
SW1 "PB SW" L-KLS7-TS6616B-2.5-160-T 117.64,13 r180 top
SW2 "PB SW" L-KLS7-TS6616B-2.5-160-T 128.29,13 r180 top
SW3 "PB SW" L-KLS7-TS6616B-2.5-160-T 117.64,4 r0 top
SW4 "PB SW" L-KLS7-TS6616B-2.5-160-T 128.29,4 r0 top
SW5 "PB SW" L-KLS7-TS6616B-2.5-160-T 21.136,4 r180 top
SW6 "Switch" JS102011JAQN 6.35,4.835 r0 top
TP1 "Ø1.0mm,SMD" TP_SMD_D1.0mm 129.5,32.1 r180 top
TP2 "Ø1.0mm,SMD" TP_SMD_D1.0mm 127.7,32.1 r180 top
TP3 "Ø1.5mm,SMD" TP_SMD_D1.5mm 33.02,19.05 r0 top
TP4 "Ø1.5mm,SMD" TP_SMD_D1.5mm 35.56,19.05 r0 top
TP5 "Ø1.5mm,SMD" TP_SMD_D1.5mm 33.02,16.51 r0 top
TP6 "Ø1.5mm,SMD" TP_SMD_D1.5mm 35.56,16.51 r0 top
TP7 "Ø1.5mm,SMD" TP_SMD_D1.5mm 43.18,19.05 r0 top
TP8 "Ø1.5mm,SMD" TP_SMD_D1.5mm 45.72,19.05 r0 top
TP9 "Ø1.5mm,SMD" TP_SMD_D1.5mm 43.18,16.51 r0 top
TP10 "Ø1.5mm,SMD" TP_SMD_D1.5mm 45.72,16.51 r0 top
TP11 "Ø1.5mm,SMD" TP_SMD_D1.5mm 23,21.75 r0 top
TP12 "Ø1.5mm,SMD" TP_SMD_D1.5mm 32.129,22.353 r90 bottom
TP13 "Ø1.5mm,SMD" TP_SMD_D1.5mm 36.957,24.766 r90 bottom
TP14 "Ø1.5mm,SMD" TP_SMD_D1.5mm 36.283,20.65 r90 bottom
TP15 "Ø1.5mm,SMD" TP_SMD_D1.5mm 36.83,29.529 r90 bottom
TP16 "Ø1.5mm,SMD" TP_SMD_D1.5mm 29.108,15.386 r90 bottom
TP17 "Ø1.5mm,SMD" TP_SMD_D1.5mm 6.248,36.324 r180 bottom
TP18 "Ø1.5mm,SMD" TP_SMD_D1.5mm 6.985,25.102 r180 bottom
TP19 "Ø1.5mm,SMD" TP_SMD_D1.5mm 11.074,33.276 r180 bottom
TP20 "Ø1.5mm,SMD" TP_SMD_D1.5mm 11.582,30.76 r180 bottom
TP21 "Ø1.5mm,SMD" TP_SMD_D1.5mm 19.85,10.25 r270 top
TP22 "Ø1.5mm,SMD" TP_SMD_D1.5mm 2.921,15.718 r90 bottom
TP23 "Ø1.5mm,SMD" TP_SMD_D1.5mm 24.795,21.38 r90 bottom
TP24 "TP" TESTPAD-TH 98,60 r0 top
TP25 "Ø1.5mm,SMD" TP_SMD_D1.5mm 8.3,13.7 r270 bottom
TP26 "Ø1.5mm,SMD" TP_SMD_D1.5mm 8.44,16.51 r270 bottom
TP27 "Ø1.5mm,SMD" TP_SMD_D1.5mm 6.604,9.399 r270 bottom
U1 "ECMF02-4CMX8" UFDFN50P120X250X55-8N 11.6,32.2 r0 top
U2 "SKY65943-11" SKY65943-11 134.747,37.465 r270 top
U3 "nRF5340-QKAA" AQFN40P700X700X85_HS-99N 24.925,28.459 r0 top
U4 "GD25WB256E" SON127P800X80_HS-9N 79.187,38.4 r90 top
U5 "PCAL6408A" XQFN40P180X260X50-16N 103.41,32.35 r180 top
U6 "MFFx_M2M_UICC" SON127P600X90_HS-8N 76,14.25 r0 top value="M2M UICC"
U7_S1 "FSA2466UMX" XQFN40P180X260X50-16N 64.8,44.65 r270 top (schematic designator U7)
U7_S2 "FSA2466UMX" XQFN40P180X260X50-16N 51.4,18.5 r270 top (schematic designator U7)
U7_S3 "FSA2466UMX" XQFN40P180X260X50-16N 16.6,27.45 r180 top (schematic designator U7)
U7_S4 "FSA2466UMX" XQFN40P180X260X50-16N 29.9,38.05 r90 top (schematic designator U7)
U7_S5 "FSA2466UMX" XQFN40P180X260X50-16N 103.41,36.209 r0 top (schematic designator U7)
U7_S6 "FSA2466UMX" XQFN40P180X260X50-16N 103.41,27.484 r180 top (schematic designator U7)
U7_S8 "FSA2466UMX" XQFN40P180X260X50-16N 85.2,36.875 r180 top (schematic designator U7)
U7_S10 "FSA2466UMX" XQFN40P180X260X50-16N 58.5,23.25 r0 top (schematic designator U7)
U7_S11 "FSA2466UMX" XQFN40P180X260X50-16N 56.418,44.65 r270 top (schematic designator U7)
U8_S7 "NX3DV2567" XQFN40P180X260X50-16N 99,32.35 r180 top (schematic designator U8)
U8_S9 "NX3DV2567" XQFN40P180X260X50-16N 88.1,18.05 r0 top (schematic designator U8)
U9 "nPM1300-QEAA" Nordic_QFN50P500X500X90-33N 12.525,14.175 r180 top
X1 "32MHz" BT-XTAL_2016 32.05,32.313 r90 top
Y1 "Shunt 2.54mm" Shunt_2.54mm_Horizontal 3.485,49.859 r270 top
Y2 "Shunt 2.54mm" Shunt_2.54mm_Horizontal 103.41,3.494 r0 top

## Footprints (in the part's own frame and the unit in brackets; to place one, negate y for a bottom-side part, rotate by r counter-clockwise, add the part's x,y. Pads: shape width x height; smd on the part's side, far side on the other; paste and mask are expansions set on the pad)
AQFN40P700X700X85_HS-99N [mm] "AQFN, 98-Leads, Body 7.00x7.00mm, Pitch 0.40mm, Thermal Pad 5.4x5.0mm, IPC Medium Density"
  rect 5.4x5 smd paste-5 mask+0.05: 104(0.2,0)
  round 0.4 smd paste+0.012 mask+0.05: A1(-3.2,3.2) A31(3.2,3.2) AL1(-3.2,-3.2) AL31(3.2,-3.2)
  round 0.225 smd paste+0.012 mask+0.05: A5(-2.2,3.2) A13(-0.6,3.2) A15(-0.2,3.2) A17(0.2,3.2) A19(0.6,3.2) A21(1,3.2) A23(1.4,3.2) A25(1.8,3.2) A27(2.2,3.2) AA1(-3.2,-1) AA31(3.2,-1) AB2(-2.8,-1.2) AC1(-3.2,-1.4) AC31(3.2,-1.4) AD2(-2.8,-1.6) AE1(-3.2,-1.8) AE31(3.2,-1.8) AF2(-2.8,-2) AG1(-3.2,-2.2) AG31(3.2,-2.2) AH2(-2.8,-2.4) AJ1(-3.2,-2.6) AJ31(3.2,-2.6) AK2(-2.8,-2.8) AK4(-2.4,-2.8) AK6(-2,-2.8) AK8(-1.6,-2.8) AK10(-1.2,-2.8) AK12(-0.8,-2.8) AK14(-0.4,-2.8) AK16(0,-2.8) AK18(0.4,-2.8) AK20(0.8,-2.8) AK22(1.2,-2.8) AK24(1.6,-2.8) AK26(2,-2.8) AK28(2.4,-2.8) AK30(2.8,-2.8) AL3(-2.6,-3.2) AL5(-2.2,-3.2) AL7(-1.8,-3.2) AL9(-1.4,-3.2) AL11(-1,-3.2) AL13(-0.6,-3.2) AL15(-0.2,-3.2) AL17(0.2,-3.2) AL19(0.6,-3.2) AL21(1,-3.2) AL23(1.4,-3.2) AL25(1.8,-3.2) AL27(2.2,-3.2) AL29(2.6,-3.2) B2(-2.8,2.8) B4(-2.4,2.8) B6(-2,2.8) B8(-1.6,2.8) B10(-1.2,2.8) B12(-0.8,2.8) B14(-0.4,2.8) B16(0,2.8) B18(0.4,2.8) B20(0.8,2.8) B22(1.2,2.8) B24(1.6,2.8) B26(2,2.8) B28(2.4,2.8) B30(2.8,2.8) C1(-3.2,2.6) C31(3.2,2.6) D2(-2.8,2.4) E1(-3.2,2.2) E31(3.2,2.2) F2(-2.8,2) G1(-3.2,1.8) G31(3.2,1.8) H2(-2.8,1.6) J1(-3.2,1.4) J31(3.2,1.4) K2(-2.8,1.2) L1(-3.2,1) L31(3.2,1) M2(-2.8,0.8) N1(-3.2,0.6) N31(3.2,0.6) P2(-2.8,0.4) R1(-3.2,0.2) R31(3.2,0.2) T2(-2.8,0) U1(-3.2,-0.2) U31(3.2,-0.2) V2(-2.8,-0.4) W1(-3.2,-0.6) W31(3.2,-0.6) Y2(-2.8,-0.8)
  rrect15% 1.1x1 on Top Paste: ""(-1.75,-1.8) ""(-1.75,-0.6) ""(-1.75,0.6) ""(-1.75,1.8) ""(-0.45,-1.8) ""(-0.45,-0.6) ""(-0.45,0.6) ""(-0.45,1.8) ""(0.85,-1.8) ""(0.85,-0.6) ""(0.85,0.6) ""(0.85,1.8) ""(2.15,-1.8) ""(2.15,-0.6) ""(2.15,0.6) ""(2.15,1.8)
  silkscreen extent -4.22,3.23 -3.97,3.47, body extent -3.5,-3.5 3.5,3.5, height 0.85
BT-XTAL_2016 [mm] "Crystal 2.0 x 1.6 mm"
  rect 0.95x0.85 smd: 1(-0.725,-0.575) 2(0.725,-0.575) 3(0.725,0.575) 4(-0.725,0.575)
  body extent -1.05,-0.85 1.05,0.85, height 0.56
CAPC0603X03L_C [mm] "Chip Capacitor, 2-Leads, Body 0.6x0.3mm, IPC High Density"
  rect 0.27x0.3 smd mask+0.05: 1(-0.285,0) 2(0.285,0)
  body extent -0.3,-0.15 0.31,0.15, height 0.3
CAPC0603X03L_C_NC [mm] "Chip Capacitor, 2-Leads, Body 0.6x0.3mm, IPC High Density"
  rect 0.27x0.3 smd mask+0.05: 1(-0.285,0) 2(0.285,0)
CAPC1005X04L [mm] "Chip Capacitor, 2-Leads, Body 1.0x0.5mm, IPC High Density"
  rect 0.6x0.5 smd: 1(-0.5,0) 2(0.5,0)
  body extent -0.51,-0.25 0.51,0.25, height 0.5
CAPC1005X04L_NC [mm] "Chip Capacitor, 2-Leads, Body 1.0x0.5mm, IPC High Density"
  rect 0.6x0.5 smd: 1(-0.5,0) 2(0.5,0)
CAPC1608X06L [mm] "Chip Capacitor, 2-Leads, Body 1.6x0.8mm, IPC High Density"
  rect 0.75x0.8 smd: 1(-0.675,0) 2(0.675,0)
  silkscreen extent -1.17,-0.5 1.17,0.5, body extent -0.8,-0.43 0.8,0.43, height 0.8
CAPC1608X06L_NC [mm] "Chip Capacitor, 2-Leads, Body 1.6x0.8mm, IPC High Density"
  rect 0.75x0.8 smd: 1(-0.675,0) 2(0.675,0)
  silkscreen extent -1.17,-0.5 1.17,0.5
"COAXIAL RF U.FL-R-SMT-1" [mm]
  rect 1x1.05 smd: 1(0,-1.525)
  rect 1.05x2.2 smd: 2(-1.475,0) 2(1.475,0)
  Top Layer pour cut-out: 0.85,1.3 -0.85,1.3 -0.85,-1.525 0.85,-1.525
  silkscreen extent -0.62,-0.62 0.62,1.3, body extent -1.5,-1.6 1.5,1.5, height 1.25
COAXIAL-SWF [mm]
  rect 0.5x0.58 smd: 1(0,1.16) 3(0,-1.16)
  rect 0.75x0.8 smd: 2(-1.025,-0.95) 2(-1.025,0.95) 2(1.025,-0.95) 2(1.025,0.95)
  Top Layer pour cut-out: -0.65,0.55 0.65,0.55 0.65,1.35 -0.65,1.35
  Top Layer pour cut-out: 0.65,-0.55 -0.65,-0.55 -0.65,-1.35 0.65,-1.35
  silkscreen extent -1.25,-0.22 1.25,0.22, body extent -1.26,-1.3 1.26,1.3, height 1.55
DFN65P100X40-3L [mm] "DFN, 3-Leads, Body 0.60x1.00mm, Pitch 0.65mm, IPC High Density"
  rect 0.4x0.25 smd mask+0.05: 1(-0.35,0.225) 2(-0.35,-0.225)
  rect 0.4x0.7 smd mask+0.065: 3(0.35,0)
  body extent -0.53,-0.33 0.53,0.33, height 0.4
DFN65P200X200X80_HS-6N [mm] "DFN, 6-Leads, Body 2.00x2.00mm, Pitch 0.65mm, IPC Medium Density"
  rect 0.45x0.42 smd mask+0.055: 1(-0.905,0.65) 2(-0.905,0) 3(-0.905,-0.65) 4(0.905,-0.65) 5(0.905,0) 6(0.905,0.65)
  rect 0.92x0.71 smd mask+0.055: 3(0,-0.475) 6(0,0.475)
  body extent -1.05,-1.05 1.05,1.05, height 0.65
DSGP.1575.18.4.C.02 [mm]
  rect 2x2.5 smd paste-0.25 mask+0.3: 1(0,-8.55)
  rect 3.5x3.5 smd paste-0.6 mask+0.1: 2(-6.75,-6.75) 2(-6.75,0) 2(-6.75,6.75) 2(0,6.75) 2(0,0) 2(6.75,-6.75) 2(6.75,0) 2(6.75,6.75)
  Keep-Out Layer lines w0.01: -1.26,-10.14 -1.84,-10.14 -1.84,-6.96 1.84,-6.96 1.84,-10.14 1.26,-10.14
  Multi-Layer pour cut-out: -2,-6.8 -2,-10.3 2,-10.3 2,-6.8
  silkscreen extent -9,-9 9,9, body extent -9,-9.01 9,9, height 4.02
Fiducial [mm] "Fiducial Mark"
  round 1 smd far side paste+0 mask+0.5: 0(0,0)
  round 1 smd paste+0 mask+0.5: 0(0,0)
  Top Layer keep-out circle w0.01: c0,0 r1
  Bottom Layer keep-out circle w0.01: c0,0 r1
HDR_2x3-SMD [mil] "Board-Board Conn, Header, 6-way, 2-row"
  rect 40x113 smd: 1(-100,-100) 2(-100,100) 3(0,-100) 4(0,100) 5(100,-100) 6(100,100)
  silkscreen extent -160,-140 150,100, body extent -150,-148 150,148, height 382
HDR_2x5-SMD-1.27mm [mm] "Pin Header, 1.27mm SMD"
  rect 0.76x2.4 smd: 1(-2.54,-1.95) 2(-2.54,1.95) 3(-1.27,-1.95) 4(-1.27,1.95) 5(0,-1.95) 6(0,1.95) 7(1.27,-1.95) 8(1.27,1.95) 9(2.54,-1.95) 10(2.54,1.95)
  silkscreen extent -3.17,-0.35 3.17,0.35, body extent -3.16,-2.92 3.19,2.92, height 5.96
HDR_2x5-SMD-1.27mm-K [mm] "SMT MICRO HEADER, (1,27) .050\" Keying Shroud"
  rect 0.76x2.4 smd: 1(-2.54,-1.95) 2(-2.54,1.95) 3(-1.27,-1.95) 4(-1.27,1.95) 5(0,-1.95) 6(0,1.95) 7(1.27,-1.95) 8(1.27,1.95) 9(2.54,-1.95) 10(2.54,1.95)
  silkscreen extent -3.17,-0.35 3.17,0.35, body extent -3.14,-2.92 3.14,2.92, height 6.11
HDR_2x6-NC [mm] "Pin Header, 2.54mm through hole"
  rect 1.5x1.5 hole 0.9: 1(-6.35,-1.27)
  round 1.5 hole 0.9: 2(-6.35,1.27) 3(-3.81,-1.27) 4(-3.81,1.27) 5(-1.27,-1.27) 6(-1.27,1.27) 7(1.27,-1.27) 8(1.27,1.27) 9(3.81,-1.27) 10(3.81,1.27) 11(6.35,-1.27) 12(6.35,1.27)
  silkscreen extent -7.62,-2.41 7.62,2.54
HDR_2x8-NC [mm] "Pin Header, 2.54mm through hole"
  rect 1.5x1.5 hole 0.9: 1(-8.89,-1.27)
  round 1.5 hole 0.9: 2(-8.89,1.27) 3(-6.35,-1.27) 4(-6.35,1.27) 5(-3.81,-1.27) 6(-3.81,1.27) 7(-1.27,-1.27) 8(-1.27,1.27) 9(1.27,-1.27) 10(1.27,1.27) 11(3.81,-1.27) 12(3.81,1.27) 13(6.35,-1.27) 14(6.35,1.27) 15(8.89,-1.27) 16(8.89,1.27)
  silkscreen extent -10.16,-2.41 10.16,2.54
HDR_2x10-NC [mm] "Pin Header, 2.54mm through hole"
  rect 1.5x1.5 hole 0.9: 1(-11.43,-1.27)
  round 1.5 hole 0.9: 2(-11.43,1.27) 3(-8.89,-1.27) 4(-8.89,1.27) 5(-6.35,-1.27) 6(-6.35,1.27) 7(-3.81,-1.27) 8(-3.81,1.27) 9(-1.27,-1.27) 10(-1.27,1.27) 11(1.27,-1.27) 12(1.27,1.27) 13(3.81,-1.27) 14(3.81,1.27) 15(6.35,-1.27) 16(6.35,1.27) 17(8.89,-1.27) 18(8.89,1.27) 19(11.43,-1.27) 20(11.43,1.27)
  silkscreen extent -12.7,-2.41 12.7,2.54
HDR_2x10-SMD-1.27mm-K-SWD [mm] "SMT MICRO HEADER, (1,27) .050\" Keying Shroud w/ pin 7 removed"
  rect 0.76x2.4 smd: 1(-5.715,-1.95) 2(-5.715,1.95) 3(-4.445,-1.95) 4(-4.445,1.95) 5(-3.175,-1.95) 6(-3.175,1.95) 8(-1.905,1.95) 9(-0.635,-1.95) 10(-0.635,1.95) 11(0.635,-1.95) 12(0.635,1.95) 13(1.905,-1.95) 14(1.905,1.95) 15(3.175,-1.95) 16(3.175,1.95) 17(4.445,-1.95) 18(4.445,1.95) 19(5.715,-1.95) 20(5.715,1.95)
  silkscreen extent -6.35,-3.15 6.35,0.35, body extent -6.35,-2.92 6.35,2.92, height 6.11
INDC0603X03L_C [mm] "Chip Inductor, 2-Leads, Body 0.6x0.3mm, IPC High Density"
  rect 0.27x0.3 smd: 1(-0.285,0) 2(0.285,0)
  body extent -0.3,-0.15 0.3,0.15, height 0.3
INDC1005X04L [mm] "Chip Inductor, 2-Leads, Body 1.0x0.5mm, IPC High Density"
  rect 0.65x0.5 smd: 1(-0.475,0) 2(0.475,0)
  body extent -0.5,-0.28 0.5,0.33, height 0.5
INDC1005X04L_NC [mm] "Chip Inductor, 2-Leads, Body 1.0x0.5mm, IPC High Density"
  rect 0.65x0.5 smd: 1(-0.475,0) 2(0.475,0)
INDC1005X04L_WW [mm] "Chip Inductor, 2-Leads, Body 1.0x0.5mm, IPC High Density"
  rect 0.65x0.5 smd: 1(-0.475,0) 2(0.475,0)
  body extent -0.5,-0.3 0.5,0.3, height 0.51
INDC1608X06L [mm] "Chip Inductor, 2-Leads, Body 1.6x0.8mm, IPC High Density"
  rect 0.75x0.8 smd: 1(-0.675,0) 2(0.675,0)
  silkscreen extent -1.17,-0.5 1.17,0.5, body extent -0.8,-0.48 0.8,0.48, height 0.8
INDC2016X10N [mm] "Chip Inductor, 2-Leads, Body 2.00x1.60mm, IPC Medium Density"
  rect 1.13x1.82 smd: 1(-0.885,0) 2(0.885,0)
  body extent -1.1,-0.9 1.1,0.9, height 1
JS102011JAQN [mm] "Slide Switches - DPDT, SMD, ON-ON"
  round 0.9 hole 0.9 unplated mask+0: 0(-3.4,0) 0(3.4,0)
  rect 0.5x0.5 smd: 1(-2.5,-1.2) 3(2.5,-1.2) 4(-2.5,1.2) 6(2.5,1.2)
  rect 1x1.6 smd: 2(0,-1.2) 5(0,1.2)
  Top Layer region: -3,0.562 -2.838,0.4 -2,0.4 -2,2 -3,2
  Top Layer region: -3,-0.562 -2.838,-0.4 -2,-0.4 -2,-2 -3,-2
  Top Layer region: 3,0.562 2.838,0.4 2,0.4 2,2 3,2
  Top Layer region: 3,-0.562 2.838,-0.4 2,-0.4 2,-2 3,-2
  silkscreen extent -4.5,-3.8 4.5,1.75, body extent -4.25,-3.75 4.25,1.75, height 3.5
KLS1-SIM-066 [mm]
  rect 0.7x2.1 smd: 0(-1.67,-13.55) 0(-1.67,-1.55) 0(11.32,-13.55) 0(11.32,-1.55)
  rect 0.75x1.2 smd: C1(5.08,0) C2(2.54,0) C3(0,0) C5(6.35,0) C6(3.81,0) C7(1.27,0)
  rect 0.65x1.2 smd: CD(7.3,0)
  round 0.75 hole 0.75 unplated: ""(-0.17,-12.3) ""(8.33,-12.3)
  Top Layer keep-out region: 6.83,-13.4 5.63,-13.4 5.63,-9.6 6.83,-9.6
  Top Layer keep-out region: 4.29,-13.4 3.09,-13.4 3.09,-9.6 4.29,-9.6
  Top Layer keep-out region: 1.75,-13.4 0.55,-13.4 0.55,-9.6 1.75,-9.6
  Top Layer keep-out region: 6.83,-6.5 5.63,-6.5 5.63,-2.7 6.83,-2.7
  Top Layer keep-out region: 4.29,-6.5 3.09,-6.5 3.09,-2.7 4.29,-2.7
  Top Layer keep-out region: 1.75,-6.5 0.55,-6.5 0.55,-2.7 1.75,-2.7
  silkscreen extent -1.38,-14.3 11.02,-0.7, body extent -1.72,-14.49 11.37,0.09, height 1.44
L-KLS7-TS6616B-2.5-160-T [mm] "6.2Ã—6.4mm TACT Switch, without ground connector"
  rect 2.75x1.4 smd: 1(-3.025,2) 1(3.025,2) 2(-3.025,-2) 2(3.025,-2)
  silkscreen extent -3,-3 3,3, body extent -3.6,-3.1 3.6,3.1, height 2.5
LabelSilk_15x40 [mm] "PCA version label, stick-on, 15x40mm"
  silkscreen extent 0,0 40,15, body extent 0,0 40,15, height 0.05
LED_0603_G [mil] "SMD Super Bright LED, GREEN"
  rect 30x32 smd: 1(-27.5,0) 2(27.5,0)
  silkscreen extent -58,-10 -58,10, body extent -32,-16 32,16, height 24
LGA50P1210X1110X130-113N [mm]
  rect 0.7x0.45 smd paste-2539.97 mask-5: 1(-5,-5.625)
  rect 0.3x0.45 smd mask+0.05: 2(-4.25,-5.625) 3(-3.75,-5.625) 4(-3.25,-5.625) 5(-2.75,-5.625) 6(-2.25,-5.625) 7(-1.75,-5.625) 8(-1.25,-5.625) 9(-0.75,-5.625) 10(-0.25,-5.625) 11(0.25,-5.625) 12(0.75,-5.625) 13(1.25,-5.625) 14(1.75,-5.625) 15(2.25,-5.625) 16(2.75,-5.625) 17(3.25,-5.625) 18(3.75,-5.625) 19(4.25,-5.625) 42(4.25,5.625) 43(3.75,5.625) 44(3.25,5.625) 45(2.75,5.625) 46(2.25,5.625) 47(1.75,5.625) 48(1.25,5.625) 49(0.75,5.625) 50(0.25,5.625) 51(-0.25,5.625) 52(-0.75,5.625) 53(-1.25,5.625) 54(-1.75,5.625) 55(-2.25,5.625) 56(-2.75,5.625) 57(-3.25,5.625) 58(-3.75,5.625) 59(-4.25,5.625)
  rect 0.7x0.7 smd mask+0.05: 20(5,-5.5) 41(5,5.5) 60(-5,5.5)
  rect 0.45x0.3 smd mask+0.05: 21(5.125,-4.75) 22(5.125,-4.25) 23(5.125,-3.75) 24(5.125,-3.25) 25(5.125,-2.75) 26(5.125,-2.25) 27(5.125,-1.75) 28(5.125,-1.25) 29(5.125,-0.75) 30(5.125,-0.25) 31(5.125,0.25) 32(5.125,0.75) 33(5.125,1.25) 34(5.125,1.75) 35(5.125,2.25) 36(5.125,2.75) 37(5.125,3.25) 38(5.125,3.75) 39(5.125,4.25) 40(5.125,4.75) 61(-5.125,4.75) 62(-5.125,4.25) 63(-5.125,3.75) 64(-5.125,3.25) 65(-5.125,2.75) 66(-5.125,2.25) 67(-5.125,1.75) 68(-5.125,1.25) 69(-5.125,0.75) 70(-5.125,0.25) 71(-5.125,-0.25) 72(-5.125,-0.75) 73(-5.125,-1.25) 74(-5.125,-1.75) 75(-5.125,-2.25) 76(-5.125,-2.75) 77(-5.125,-3.25) 78(-5.125,-3.75) 79(-5.125,-4.25) 80(-5.125,-4.75)
  rect 0.3x0.3 smd mask+0.05: 81(-3.4,-4.1) 82(-2.85,-4.1) 83(-2.3,-4.1) 84(-0.55,-4.1) 85(0,-4.1) 86(0.55,-4.1) 87(2.3,-4.1) 88(2.85,-4.1) 89(3.4,-4.1) 90(2.15,-0.55) 91(2.15,0) 92(2.15,0.55) 93(3.4,4.1) 94(2.85,4.1) 95(2.3,4.1) 96(0.55,4.1) 97(0,4.1) 98(-0.55,4.1) 99(-2.3,4.1) 100(-2.85,4.1) 101(-3.4,4.1) 102(-2.15,0.55) 103(-2.15,0) 104(-2.15,-0.55)
  rect 1.6x1.6 smd mask+0.05: 105(-2.85,-2.85) 106(0,-2.85) 107(2.85,-2.85) 109(2.85,2.85) 110(0,2.85) 111(-2.85,2.85) 113(0,0)
  rect 1.95x1.6 smd mask+0.05: 108(3.575,0) 112(-3.575,0)
  Top Layer region: -5.35,-5.15 -5.35,-5.85 -4.65,-5.85 -4.65,-5.4 -4.9,-5.15
  silkscreen extent -5.99,-6.5 -5.69,-6.2, body extent -5.6,-6.1 5.6,6.1, height 1.21
LIST_1x6_SMD-NC [mm] "Pin List, 2.54mm, SMD"
  rect 1.02x2.19 smd: 1(0,-1.465) 1(0,1.465) 2(2.54,-1.465) 2(2.54,1.465) 3(5.08,-1.465) 3(5.08,1.465) 4(7.62,-1.465) 4(7.62,1.465) 5(10.16,-1.465) 5(10.16,1.465) 6(12.7,-1.465) 6(12.7,1.465)
  silkscreen extent -1.27,-1.27 13.97,1.27
LIST_1x8_SMD-NC [mm] "Pin List, 2.54mm, SMD"
  rect 1.02x2.19 smd: 1(0,-1.465) 1(0,1.465) 2(2.54,-1.465) 2(2.54,1.465) 3(5.08,-1.465) 3(5.08,1.465) 4(7.62,-1.465) 4(7.62,1.465) 5(10.16,-1.465) 5(10.16,1.465) 6(12.7,-1.465) 6(12.7,1.465) 7(15.24,-1.465) 7(15.24,1.465) 8(17.78,-1.465) 8(17.78,1.465)
  silkscreen extent -1.27,-1.27 19.05,1.27
LIST_1x10_SMD-NC [mm] "Pin List, 2.54mm, SMD"
  rect 1.02x2.19 smd: 1(0,-1.465) 1(0,1.465) 2(2.54,-1.465) 2(2.54,1.465) 3(5.08,-1.465) 3(5.08,1.465) 4(7.62,-1.465) 4(7.62,1.465) 5(10.16,-1.465) 5(10.16,1.465) 6(12.7,-1.465) 6(12.7,1.465) 7(15.24,-1.465) 7(15.24,1.465) 8(17.78,-1.465) 8(17.78,1.465) 9(20.32,-1.465) 9(20.32,1.465) 10(22.86,-1.465) 10(22.86,1.465)
  silkscreen extent -1.27,-1.27 24.13,1.27
LIST_1x13_SMD [mm] "Pin List, 2.54mm, SMD"
  rect 1.02x2.19 smd: 1(0,-1.465) 1(0,1.465) 2(2.54,-1.465) 2(2.54,1.465) 3(5.08,-1.465) 3(5.08,1.465) 4(7.62,-1.465) 4(7.62,1.465) 5(10.16,-1.465) 5(10.16,1.465) 6(12.7,-1.465) 6(12.7,1.465) 7(15.24,-1.465) 7(15.24,1.465) 8(17.78,-1.465) 8(17.78,1.465) 9(20.32,-1.465) 9(20.32,1.465) 10(22.86,-1.465) 10(22.86,1.465) 11(25.4,-1.465) 11(25.4,1.465) 12(27.94,-1.465) 12(27.94,1.465) 13(30.48,-1.465) 13(30.48,1.465)
  silkscreen extent -1.27,-1.27 31.75,1.27, body extent -1.27,-2.5 31.75,2.5, height 9.82
LIST_1x13_SMD-NC [mm] "Pin List, 2.54mm, SMD"
  rect 1.02x2.19 smd: 1(0,-1.465) 1(0,1.465) 2(2.54,-1.465) 2(2.54,1.465) 3(5.08,-1.465) 3(5.08,1.465) 4(7.62,-1.465) 4(7.62,1.465) 5(10.16,-1.465) 5(10.16,1.465) 6(12.7,-1.465) 6(12.7,1.465) 7(15.24,-1.465) 7(15.24,1.465) 8(17.78,-1.465) 8(17.78,1.465) 9(20.32,-1.465) 9(20.32,1.465) 10(22.86,-1.465) 10(22.86,1.465) 11(25.4,-1.465) 11(25.4,1.465) 12(27.94,-1.465) 12(27.94,1.465) 13(30.48,-1.465) 13(30.48,1.465)
  silkscreen extent -1.27,-1.27 31.75,1.27
LIST_ANG_1x2-SMD-2.54MM [mm] "Pin List, 2.54mm, Surface Mount, Angled"
  round 1.78 hole 1.78 unplated: 0(0,-4.496)
  rect 1.27x3.18 smd: 1(-1.27,0) 2(1.27,0)
  silkscreen extent -2.54,-11.58 2.54,-1.92, body extent -2.56,-11.61 2.52,1.35, height 3.03
LIST_ANG_1x4-SMD-2.54MM [mm] "Pin List, 2.54mm, Surface Mount, Angled"
  round 1.78 hole 1.78 unplated: 0(-2.54,-4.496) 0(2.54,-4.496)
  rect 1.27x3.18 smd: 1(-3.81,0) 2(-1.27,0) 3(1.27,0) 4(3.81,0)
  silkscreen extent -5.08,-11.58 5.08,-1.92, body extent -5.1,-11.61 5.06,1.35, height 3.03
LIST_ANG_1x6-SMD-2.54MM [mm] "Pin List, 2.54mm, Surface Mount, Angled"
  round 1.78 hole 1.78 unplated: 0(-5.08,-4.496) 0(5.08,-4.496)
  rect 1.27x3.18 smd: 1(-6.35,0) 2(-3.81,0) 3(-1.27,0) 4(1.27,0) 5(3.81,0) 6(6.35,0)
  silkscreen extent -6.6,-9.74 6.73,2.79, body extent -7.64,-11.61 7.6,1.35, height 3.03
Molex_502774-0891 [mm] "SD Micro, Molex 0473521001, Push-Push"
  rect 1.5x1.7 smd mask+0.05: 0(-0.75,14.77) 0(12.75,14.77)
  rect 1.6x1.5 smd mask+0.05: 0(-0.21,0)
  rect 1.7x1.5 smd mask+0.05: 0(12.45,0)
  rect 0.8x1.68 smd mask+0.05: 1(8.9,0.08) 2(7.8,0.08) 3(6.7,0.08) 4(5.6,0.08) 5(4.5,0.08) 6(3.4,0.08) 7(2.3,0.08) 8(1.2,0.08)
  rect 1.29x1.3 smd mask+0.05: 9(-0.96,1.6)
  rect 1.29x1.4 smd mask+0.05: 10(-0.96,8.97)
  silkscreen extent -1.2,0 13,15, body extent -1.2,-0.61 13.1,15.39, height 1.78
NORDIC_LOGO_LYING [mm]
  silkscreen extent -2.57,-2.24 13.7,2.24
Nordic_QFN50P500X500X90-33N [mm] "QFN32 5x5x0.85mm, 0.5mm pitch - Medium Density"
  oval 0.85x0.3 smd: 1(-2.45,1.75) 2(-2.45,1.25) 3(-2.45,0.75) 4(-2.45,0.25) 5(-2.45,-0.25) 6(-2.45,-0.75) 7(-2.45,-1.25) 8(-2.45,-1.75) 17(2.45,-1.75) 18(2.45,-1.25) 19(2.45,-0.75) 20(2.45,-0.25) 21(2.45,0.25) 22(2.45,0.75) 23(2.45,1.25) 24(2.45,1.75)
  oval 0.3x0.85 smd: 9(-1.75,-2.45) 10(-1.25,-2.45) 11(-0.75,-2.45) 12(-0.25,-2.45) 13(0.25,-2.45) 14(0.75,-2.45) 15(1.25,-2.45) 16(1.75,-2.45) 25(1.75,2.45) 26(1.25,2.45) 27(0.75,2.45) 28(0.25,2.45) 29(-0.25,2.45) 30(-0.75,2.45) 31(-1.25,2.45) 32(-1.75,2.45)
  rect 3.5x3.5 smd: 33(0,0)
  silkscreen extent -3.43,2.38 -3.18,2.62, body extent -2.5,-2.5 2.5,2.5, height 0.9